# EAGLE board SparkFun_Thing_Plus_NORA_W306-Panel (EAGLE 9.6.2), part 1 of 7
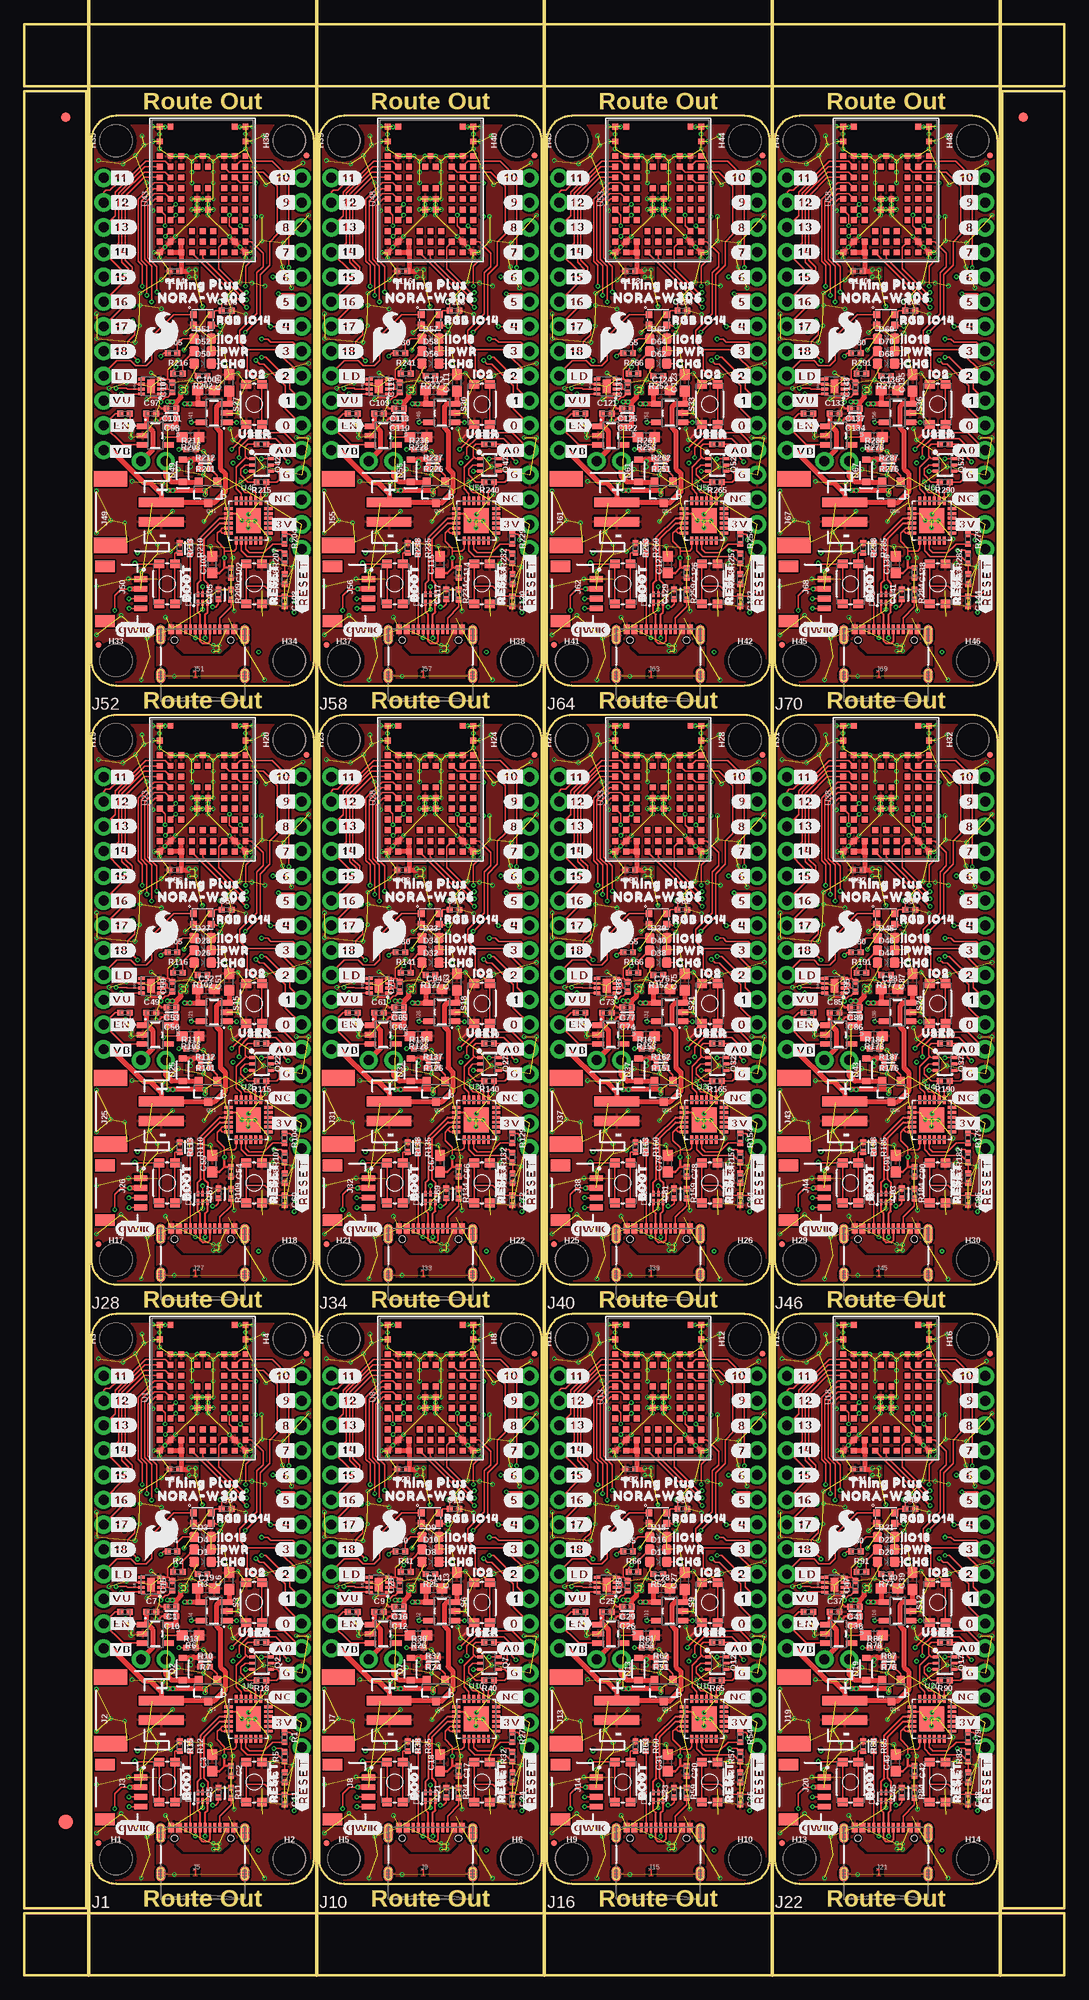
[diagram p0: board, top side]
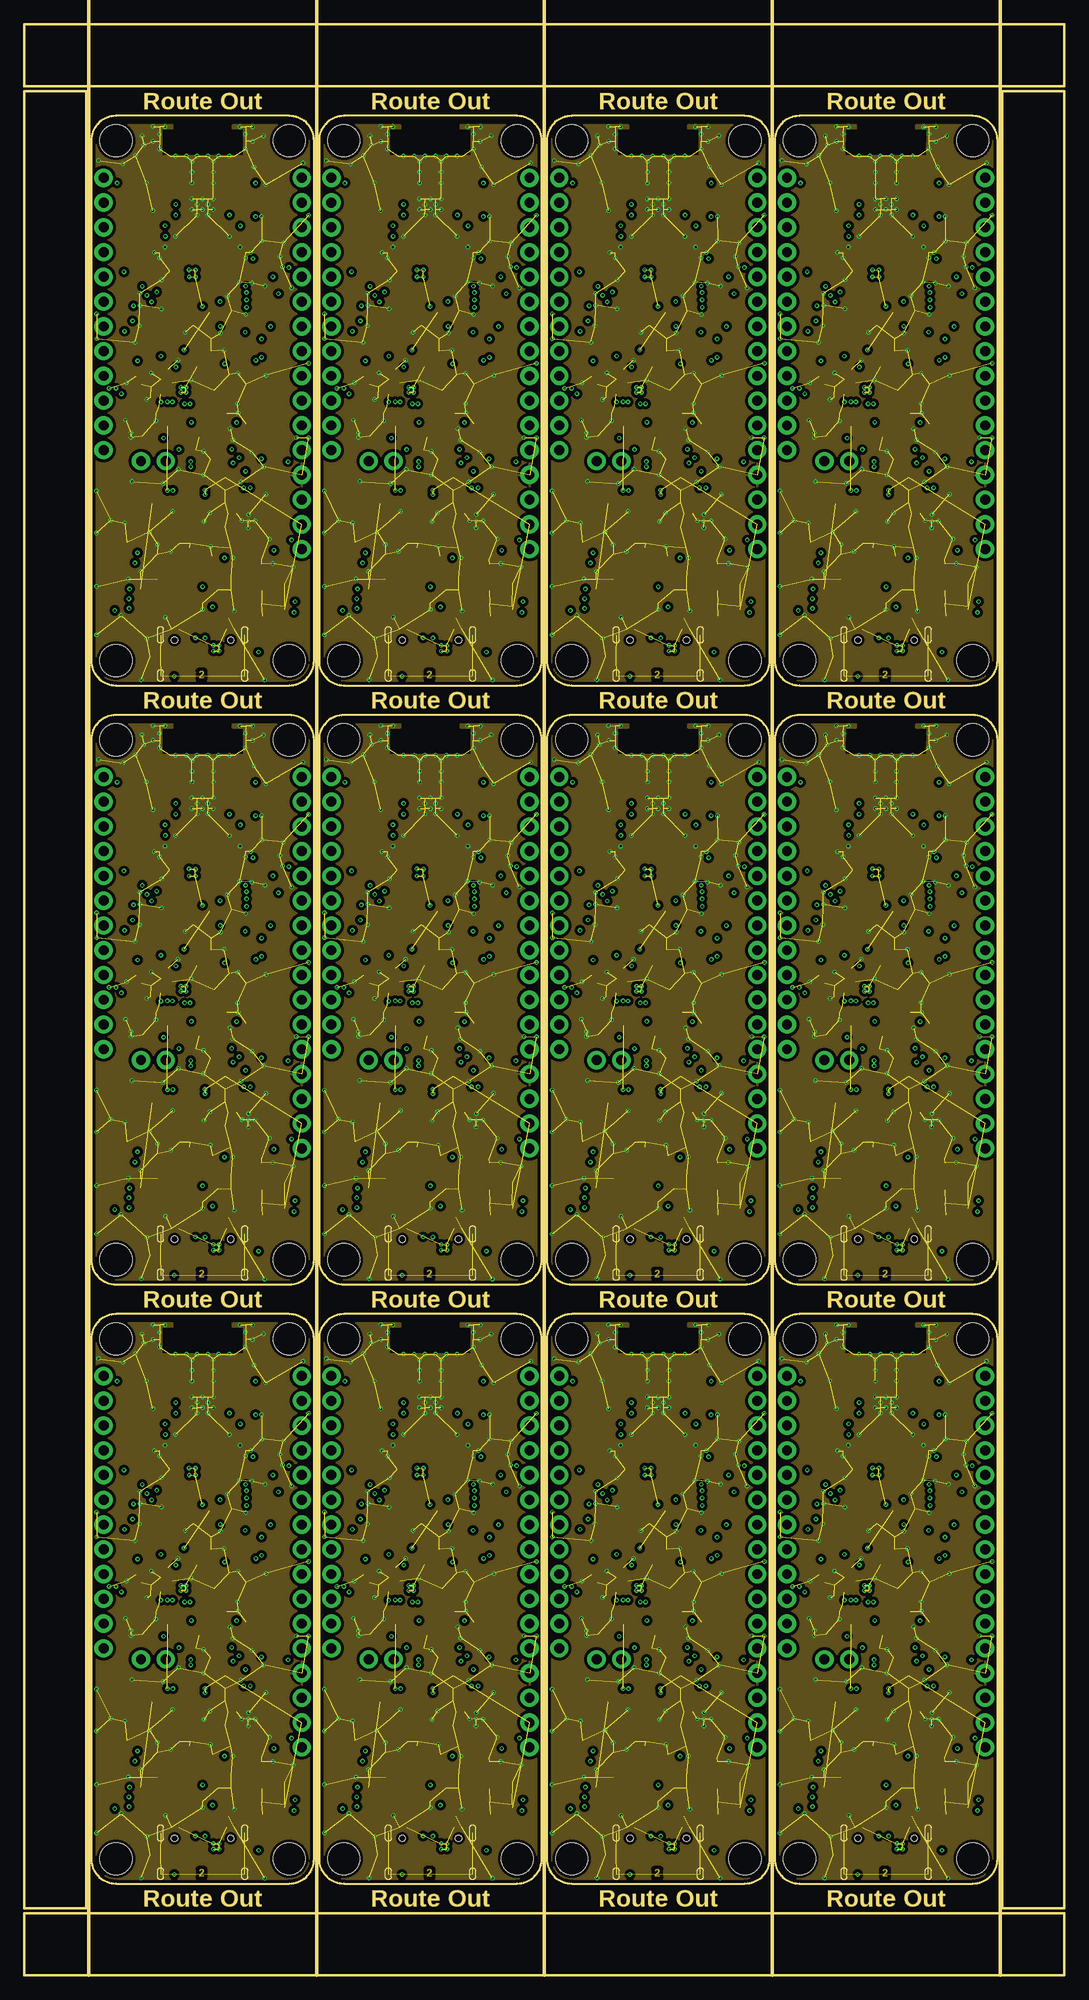
[diagram p1: board, inner layer Route2]
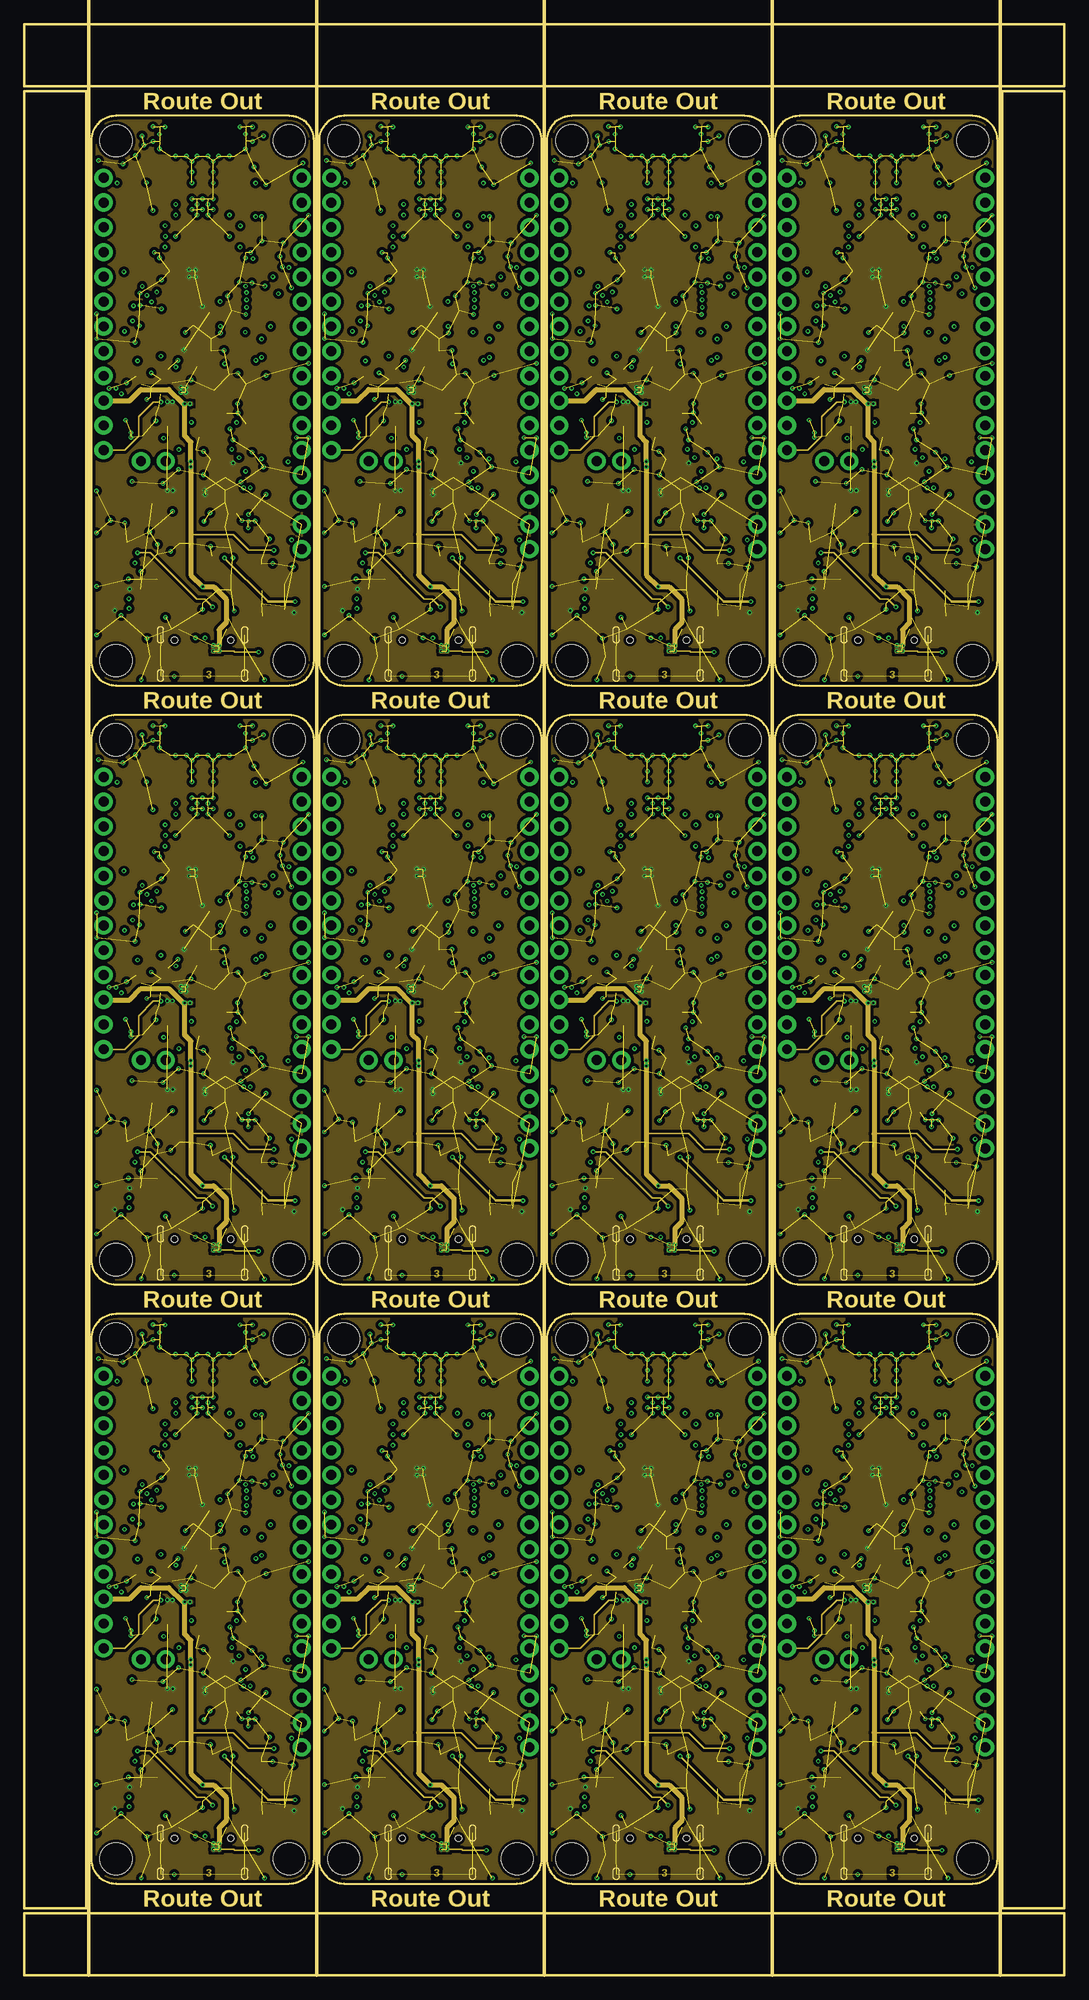
[diagram p2: board, inner layer Route15]
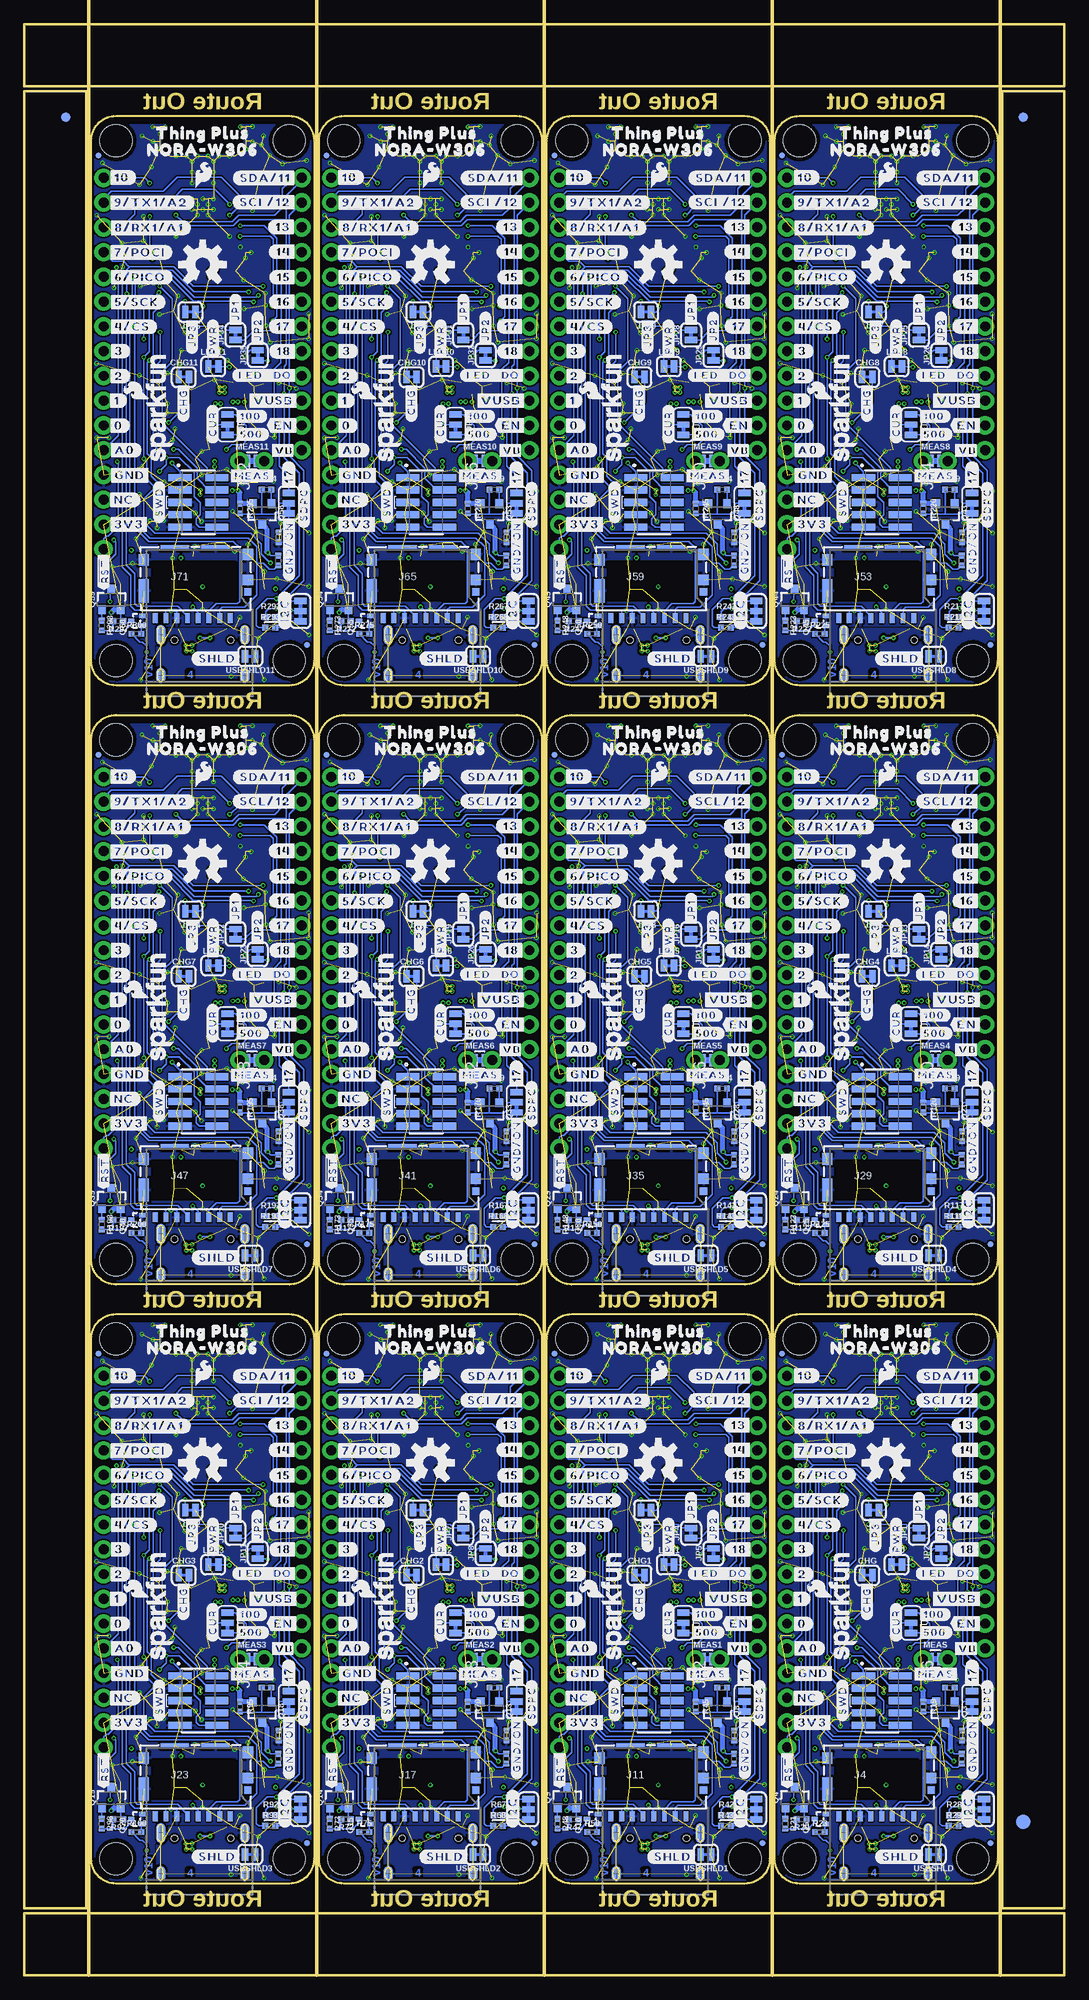
[diagram p3: board, bottom side, seen from below]

Size 106.68 x 200.15 mm. Coordinates in mm from the lower left corner, seen from the top.
Outline: 29.72,11.94 29.72,65.28 arc90 27.18,67.82 9.4,67.82 arc90 6.86,65.28 6.86,11.94 arc90 9.4,9.4 27.18,9.4 arc90 29.72,11.94
Outline: 53.09,11.94 53.09,65.28 arc90 50.55,67.82 32.77,67.82 arc90 30.23,65.28 30.23,11.94 arc90 32.77,9.4 50.55,9.4 arc90 53.09,11.94
Outline: 76.45,11.94 76.45,65.28 arc90 73.91,67.82 56.13,67.82 arc90 53.59,65.28 53.59,11.94 arc90 56.13,9.4 73.91,9.4 arc90 76.45,11.94
Outline: 99.82,11.94 99.82,65.28 arc90 97.28,67.82 79.5,67.82 arc90 76.96,65.28 76.96,11.94 arc90 79.5,9.4 97.28,9.4 arc90 99.82,11.94
Outline: 29.72,73.41 29.72,126.75 arc90 27.18,129.29 9.4,129.29 arc90 6.86,126.75 6.86,73.41 arc90 9.4,70.87 27.18,70.87 arc90 29.72,73.41
Outline: 53.09,73.41 53.09,126.75 arc90 50.55,129.29 32.77,129.29 arc90 30.23,126.75 30.23,73.41 arc90 32.77,70.87 50.55,70.87 arc90 53.09,73.41
Outline: 76.45,73.41 76.45,126.75 arc90 73.91,129.29 56.13,129.29 arc90 53.59,126.75 53.59,73.41 arc90 56.13,70.87 73.91,70.87 arc90 76.45,73.41
Outline: 99.82,73.41 99.82,126.75 arc90 97.28,129.29 79.5,129.29 arc90 76.96,126.75 76.96,73.41 arc90 79.5,70.87 97.28,70.87 arc90 99.82,73.41
Outline: 29.72,134.87 29.72,188.21 arc90 27.18,190.75 9.4,190.75 arc90 6.86,188.21 6.86,134.87 arc90 9.4,132.33 27.18,132.33 arc90 29.72,134.87
Outline: 53.09,134.87 53.09,188.21 arc90 50.55,190.75 32.77,190.75 arc90 30.23,188.21 30.23,134.87 arc90 32.77,132.33 50.55,132.33 arc90 53.09,134.87
Outline: 76.45,134.87 76.45,188.21 arc90 73.91,190.75 56.13,190.75 arc90 53.59,188.21 53.59,134.87 arc90 56.13,132.33 73.91,132.33 arc90 76.45,134.87
Outline: 99.82,134.87 99.82,188.21 arc90 97.28,190.75 79.5,190.75 arc90 76.96,188.21 76.96,134.87 arc90 79.5,132.33 97.28,132.33 arc90 99.82,134.87
Outline: 0,6.35 106.68,6.35 106.68,0 0,0 0,6.35
Outline: 100.33,193.29 106.68,193.29 106.68,6.86 100.33,6.86 100.33,193.29
Outline: 0,200.15 106.68,200.15 106.68,193.8 0,193.8 0,200.15
Outline: 0,193.29 6.35,193.29 6.35,6.86 0,6.86 0,193.29
Copper layers (1*2*15*16): Top 0.035559375mm / dielectric 0.47751875mm / Route2 0.035559375mm / dielectric 0.47751875mm / Route15 0.035559375mm / dielectric 0.47751875mm / Bottom 0.035559375mm
Design rules "SparkFun_Thing_Plus_NORA_W306": minimum track width 5mil, minimum drill 0.2mm, track to track 5mil, track to pad 5mil, pad to pad 5mil, via to via 5mil, smd to smd 5mil, copper to edge 7mil, drill to drill 7mil, minimum pad ring 5mil, minimum via ring 5mil, stop-mask expansion 2.5mil, vias tented up to drill 25mil, thermal gap 10mil
Net classes: 0 default: width 0 mm, drill 0 mm
tRestrict: area 24.4,26.2 to 24.5,26.4; area 22.9,27.7 to 23,27.8; area 21.5,26.2 to 21.6,26.4; area 22.9,24.8 to 23.1,24.9; area 47.8,26.2 to 47.9,26.4; area 46.3,27.7 to 46.4,27.8; area 44.9,26.2 to 44.9,26.4; area 46.3,24.8 to 46.4,24.9; area 71.1,26.2 to 71.2,26.4; area 69.7,27.7 to 69.8,27.8; area 68.2,26.2 to 68.3,26.4; area 69.7,24.8 to 69.8,24.9; area 94.5,26.2 to 94.6,26.4; area 93,27.7 to 93.2,27.8; area 91.6,26.2 to 91.7,26.4; area 93,24.8 to 93.2,24.9; area 24.4,87.7 to 24.5,87.8; area 22.9,89.2 to 23,89.3; area 21.5,87.7 to 21.6,87.8; area 22.9,86.3 to 23.1,86.4; area 47.8,87.7 to 47.9,87.8; area 46.3,89.2 to 46.4,89.3; area 44.9,87.7 to 44.9,87.8; area 46.3,86.3 to 46.4,86.4; area 71.1,87.7 to 71.2,87.8; area 69.7,89.2 to 69.8,89.3; area 68.2,87.7 to 68.3,87.8; area 69.7,86.3 to 69.8,86.4; area 94.5,87.7 to 94.6,87.8; area 93,89.2 to 93.2,89.3; area 91.6,87.7 to 91.7,87.8; area 93,86.3 to 93.2,86.4; area 24.4,149.2 to 24.5,149.3; area 22.9,150.6 to 23,150.7; area 21.5,149.2 to 21.6,149.3; area 22.9,147.8 to 23.1,147.8; area 47.8,149.2 to 47.9,149.3; area 46.3,150.6 to 46.4,150.7; area 44.9,149.2 to 44.9,149.3; area 46.3,147.8 to 46.4,147.8; area 71.1,149.2 to 71.2,149.3; area 69.7,150.6 to 69.8,150.7; area 68.2,149.2 to 68.3,149.3; area 69.7,147.8 to 69.8,147.8; area 94.5,149.2 to 94.6,149.3; area 93,150.6 to 93.2,150.7; area 91.6,149.2 to 91.7,149.3; area 93,147.8 to 93.2,147.8
Milling: 5 lines

## Footprints (pad centres in the part's own frame; a part is rotated, then mirrored left to right if it is on the bottom)
0402-TIGHT = smd 0.6 x 0.6: 1 -0.5,0; 2 0.5,0
0603 = smd 1.1 x 1: 1 -0.85,0; 2 0.85,0
SMT-JUMPER_2_NC_TRACE_SILK = smd 0.66 x 1.27: 1 -0.521,0; 2 0.521,0
SMT-JUMPER_3_1-NC_TRACE_SILK = smd 0.66 x 1.27: 1 -1.041,0; 2 0,0; 3 1.041,0
LED-0603 = smd 1 x 1: A -0.877,0; C 0.877,0
SOD-323 = smd 0.63 x 0.83: A 1.15,0; C -1.15,0
WS2812-2020 = smd 0.7 x 0.7: DI -0.915,0.55; DO 0.915,-0.55; GND 0.915,0.55; VCC -0.915,-0.55
SOT886 = smd 0.61 x 0.25: 1 -0.405,0.5 | smd 0.56 x 0.25: 2 -0.43,0; 3 -0.43,-0.5; 4 0.43,-0.5; 5 0.43,0; 6 0.43,0.5
FIDUCIAL-1X2 = smd 1 x 1: 1 0,0
FIDUCIAL-1.5X3 = smd 1.5 x 1.5: 1 0,0
FIDUCIAL-MICRO = smd 0.635 x 0.635: 1 0,0
STAND-OFF = hole 3.302: 0,0
SMT-JUMPER_3_2-NC_TRACE_SILK = smd 0.66 x 1.27: 1 -1.041,0; 2 0,0; 3 1.041,0
THING_PLUS = drill 1.016 pad 1.88: 1 1.27,52.07; 2 1.27,49.53; 3 1.27,46.99; 4 1.27,44.45; 5 1.27,41.91; 6 1.27,39.37; 7 1.27,36.83; 8 1.27,34.29; 9 1.27,31.75; 10 1.27,29.21; 11 1.27,26.67; 12 1.27,24.13; 13 21.59,52.07; 14 21.59,49.53; 15 21.59,46.99; 16 21.59,44.45; 17 21.59,41.91; 18 21.59,39.37; 19 21.59,36.83; 20 21.59,34.29; 21 21.59,31.75; 22 21.59,29.21; 23 21.59,26.67; 24 21.59,24.13; 25 21.59,21.59; 26 21.59,19.05; 27 21.59,16.51; 28 21.59,13.97
JST-2-SMD = smd 1 x 4.6: 1 -1,-3.7; 2 1,-3.7 | smd 1.6 x 3.4: NC1 -3.4,1.5; NC2 3.4,1.5
JST04_1MM_RA = smd 0.6 x 1.35: 1 -1.5,0; 2 -0.5,0; 3 0.5,0; 4 1.5,0 | smd 1.2 x 2: NC1 2.8,-3.675; NC2 -2.8,-3.675
MICROSD_TINY = smd 0.5 x 1: 1 3.55,-3.85; 2 2.45,-3.85; 3 1.35,-3.85; 4 0.25,-3.85; 5 -0.85,-3.85; 6 -1.95,-3.85; 7 -3.05,-3.85; 8 -4.15,-3.85 | smd 0.72 x 0.78: 9 5.35,-1.17 | smd 1.05 x 1.08: GND1 5.35,0.1 | smd 1.05 x 1.2: GND2 5.35,2.71; GND3 -5.325,2.14 | smd 1.05 x 2.39: GND4 -5.325,-1.045 | smd 2.91 x 0.55: GND5 -2.145,3.385; GND6 2.045,3.385
USB-C-16P-4LAYER-ISOLATED = smd 0.3 x 1: A5 -1.25,-0.34; A6 -0.25,-0.34; A7 0.25,-0.34; A8 1.25,-0.34; B5 1.75,-0.34; B6 0.75,-0.34; B7 -0.75,-0.34; B8 -1.75,-0.34 | smd 0.6 x 1: GND -3.225,-0.34; GND2 3.225,-0.34; VBUS1 -2.45,-0.34; VBUS2 2.45,-0.34 | smd 1 x 2.1: SHLD1 -4.32,-0.915; SHLD2 4.32,-0.915 | smd 1 x 2.1 bottom: SHLD3 -4.32,-0.915; SHLD4 4.32,-0.915 | smd 1 x 1.6: SHLD5 -4.32,-5.095; SHLD8 4.32,-5.095 | smd 1 x 1.6 bottom: SHLD6 -4.32,-5.095; SHLD7 4.32,-5.095 | hole 0.65: -2.89,-1.445; 2.89,-1.445
2X5-SMD-UNSHROUDED_DNP_NO_PASTE = smd 0.74 x 2.38: 1 -2.54,-1.88; 2 -2.54,1.88; 3 -1.27,-1.88; 4 -1.27,1.88; 5 0,-1.88; 6 0,1.88; 7 1.27,-1.88; 8 1.27,1.88; 9 2.54,-1.88; 10 2.54,1.88
COMBO-JUMPER_2_NC_TRACE = smd 0.635 x 1.27: 1 -0.508,0; 2 0.508,0 | drill 1.016 pad 1.88: 3 -1.27,0; 4 1.27,0
SOT23-3 = smd 0.8 x 0.9: 1 -0.95,-1; 2 0.95,-1; 3 0,1.1
SC70-6 = smd 0.3 x 0.66: 1 -0.65,-0.92; 2 0,-0.92; 3 0.65,-0.92; 4 0.65,0.92; 5 0,0.92; 6 -0.65,0.92
SOT-416FL = smd 0.46 x 0.65: 1 -0.5,-1.1; 2 0.5,-1.1; 3 0,0.05
TACTILE_SWITCH_SMD_4.6X2.8MM = smd 0.9 x 1: 1 -2.05,-0.8; 2 2.05,-0.8; 3 2.05,0.8; 4 -2.05,0.8
UBLOX-NORA-W3 = smd 0.6 x 0.6: A1 -5.5,-4.4; A2 -5.5,-3.3; A3 -5.5,-2.2; A4 -5.5,-1.1; A5 -5.5,0; A6 -5.5,1.1; A7 -5.5,2.2; A8 -5.5,3.3; A9 -5.5,4.4; B1 -4.4,-4.4; B2 -4.4,-3.3; B3 -4.4,-2.2; B4 -4.4,-1.1; B5 -4.4,0; B6 -4.4,1.1; B7 -4.4,2.2; B8 -4.4,3.3; B9 -4.4,4.4; C1 -3.3,-4.4; C2 -3.3,-3.3; C4 -3.3,-1.1; C5 -3.3,0; C6 -3.3,1.1; C8 -3.3,3.3; C9 -3.3,4.4; D1 -2.2,-4.4; D2 -2.2,-3.3; D3 -2.2,-2.2; D7 -2.2,2.2; D8 -2.2,3.3; D9 -2.2,4.4; E1 -1.1,-4.4; E2 -1.1,-3.3; E3 -1.1,-2.2; E4 -1.1,-0.55; E5 -1.1,0.55; E7 -1.1,2.2; E8 -1.1,3.3; E9 -1.1,4.4; F1 0,-4.4; F2 0,-3.3; F3 0,-2.2; F4 0,-0.55; F5 0,0.55; F7 0,2.2; F8 0,3.3; F9 0,4.4; G1 1.1,-4.4; G2 1.1,-3.3; G3 1.1,-2.2; G4 1.1,-0.55; G5 1.1,0.55; G7 1.1,2.2; G8 1.1,3.3; G9 1.1,4.4; H1 2.2,-4.4; H2 2.2,-3.3; H3 2.2,-2.2; H7 2.2,2.2; H8 2.2,3.3; H9 2.2,4.4; J1 3.3,-4.4; J2 3.3,-3.3; J3 3.3,-2.2; J4 3.3,-0.55; J5 3.3,0.55; J7 3.3,2.2; J8 3.3,3.3; J9 3.3,4.4; K1 4.4,-4.4; K2 4.4,-3.3; K3 4.4,-2.2; K5 4.4,0; K7 4.4,2.2; K8 4.4,3.3; K9 4.4,4.4; L1 5.9,-4.4; L9 5.9,4.4; M1 7.4,-4.4; M2 7.4,-3.3; M8 7.4,3.3; M9 7.4,4.4
SOT23-5 = smd 0.55 x 1.2: 1 -0.95,-1.3; 2 0,-1.3; 3 0.95,-1.3; 4 0.95,1.3; 5 -0.95,1.3
DFN-8 = smd 0.3 x 0.7: 1 -0.75,-0.99; 2 -0.25,-0.99; 3 0.25,-0.99; 4 0.75,-0.99; 5 0.75,0.99; 6 0.25,0.99; 7 -0.25,0.99; 8 -0.75,0.99 | smd 1.38 x 0.8: 9 0,0
QFN24 = smd 0.85 x 0.3: 1 -2.05,1.25; 2 -2.05,0.75; 3 -2.05,0.25; 4 -2.05,-0.25; 5 -2.05,-0.75; 6 -2.05,-1.25; 13 2.05,-1.25; 14 2.05,-0.75; 15 2.05,-0.25; 16 2.05,0.25; 17 2.05,0.75; 18 2.05,1.25 | smd 0.3 x 0.85: 7 -1.25,-2.05; 8 -0.75,-2.05; 9 -0.25,-2.05; 10 0.25,-2.05; 11 0.75,-2.05; 12 1.25,-2.05; 19 1.25,2.05; 20 0.75,2.05; 21 0.25,2.05; 22 -0.25,2.05; 23 -0.75,2.05; 24 -1.25,2.05 | smd 2.55 x 2.55: PAD 0,0

## Placement (x,y rotation side)
C1  10uF  [0402-TIGHT]  15.08,37.8 180 top
C2  0.1uF  [0402-TIGHT]  21.2,20.96 270 top
C3  4.7uF  [0603]  19.27,21.79 90 top
C4  10uF  [0402-TIGHT]  15.39,51.91 180 top
C5  10uF  [0402-TIGHT]  19.91,18.74 90 top
C6  4.7uF  [0603]  21.01,40.44 90 top
C7  1.0uF  [0402-TIGHT]  13.01,37.27 0 top
C8  0.1uF  [0402-TIGHT]  20.76,47.84 0 top
C9  1.0uF  [0402-TIGHT]  36.38,37.27 0 top
C10  1.0uF  [0402-TIGHT]  15.09,36.83 180 top
C11  0.1uF  [0402-TIGHT]  26.69,18.03 270 top
C12  1.0uF  [0402-TIGHT]  38.45,36.83 180 top
C13  4.7uF  [0603]  44.38,40.44 90 top
C14  4.7uF  [0603]  42,39.67 0 top
C15  0.1uF  [0402-TIGHT]  15.15,39.96 90 top
C16  10uF  [0402-TIGHT]  38.45,37.8 180 top
C17  0.1uF  [0402-TIGHT]  44.56,20.96 270 top
C18  4.7uF  [0603]  42.64,21.79 90 top
C19  4.7uF  [0603]  18.63,39.67 0 top
C20  10uF  [0402-TIGHT]  38.76,51.91 180 top
C21  10uF  [0402-TIGHT]  43.27,18.74 90 top
C22  0.1uF  [0402-TIGHT]  44.13,47.84 0 top
C23  0.1uF  [0402-TIGHT]  38.52,39.96 90 top
C24  0.1uF  [0402-TIGHT]  50.06,18.03 270 top
C25  1.0uF  [0402-TIGHT]  59.75,37.27 0 top
C26  1.0uF  [0402-TIGHT]  61.82,36.83 180 top
C27  4.7uF  [0603]  67.74,40.44 90 top
C28  4.7uF  [0603]  65.37,39.67 0 top
C29  10uF  [0402-TIGHT]  61.82,37.8 180 top
C30  0.1uF  [0402-TIGHT]  67.93,20.96 270 top
C31  4.7uF  [0603]  66.01,21.79 90 top
C32  10uF  [0402-TIGHT]  62.13,51.91 180 top
C33  10uF  [0402-TIGHT]  66.64,18.74 90 top
C34  0.1uF  [0402-TIGHT]  67.5,47.84 0 top
C35  0.1uF  [0402-TIGHT]  61.89,39.96 90 top
C36  0.1uF  [0402-TIGHT]  73.43,18.03 270 top
C37  1.0uF  [0402-TIGHT]  83.11,37.27 0 top
C38  1.0uF  [0402-TIGHT]  85.19,36.83 180 top
C39  4.7uF  [0603]  91.11,40.44 90 top
C40  4.7uF  [0603]  88.74,39.67 0 top
C41  10uF  [0402-TIGHT]  85.18,37.8 180 top
C42  0.1uF  [0402-TIGHT]  91.3,20.96 270 top
C43  4.7uF  [0603]  89.37,21.79 90 top
C44  10uF  [0402-TIGHT]  85.5,51.91 180 top
C45  10uF  [0402-TIGHT]  90.01,18.74 90 top
C46  0.1uF  [0402-TIGHT]  90.87,47.84 0 top
C47  0.1uF  [0402-TIGHT]  85.26,39.96 90 top
C48  0.1uF  [0402-TIGHT]  96.8,18.03 270 top
C49  1.0uF  [0402-TIGHT]  13.01,98.73 0 top
C50  1.0uF  [0402-TIGHT]  15.09,98.3 180 top
C51  4.7uF  [0603]  21.01,101.9 90 top
C52  4.7uF  [0603]  18.63,101.14 0 top
C53  10uF  [0402-TIGHT]  15.08,99.26 180 top
C54  0.1uF  [0402-TIGHT]  21.2,82.43 270 top
C55  4.7uF  [0603]  19.27,83.26 90 top
C56  10uF  [0402-TIGHT]  15.39,113.38 180 top
C57  10uF  [0402-TIGHT]  19.91,80.21 90 top
C58  0.1uF  [0402-TIGHT]  20.76,109.31 0 top
C59  0.1uF  [0402-TIGHT]  15.15,101.43 90 top
C60  0.1uF  [0402-TIGHT]  26.69,79.5 270 top
C61  1.0uF  [0402-TIGHT]  36.38,98.73 0 top
C62  1.0uF  [0402-TIGHT]  38.45,98.3 180 top
C63  4.7uF  [0603]  44.38,101.9 90 top
C64  4.7uF  [0603]  42,101.14 0 top
C65  10uF  [0402-TIGHT]  38.45,99.26 180 top
C66  0.1uF  [0402-TIGHT]  44.56,82.43 270 top
C67  4.7uF  [0603]  42.64,83.26 90 top
C68  10uF  [0402-TIGHT]  38.76,113.38 180 top
C69  10uF  [0402-TIGHT]  43.27,80.21 90 top
C70  0.1uF  [0402-TIGHT]  44.13,109.31 0 top
C71  0.1uF  [0402-TIGHT]  38.52,101.43 90 top
C72  0.1uF  [0402-TIGHT]  50.06,79.5 270 top
C73  1.0uF  [0402-TIGHT]  59.75,98.73 0 top
C74  1.0uF  [0402-TIGHT]  61.82,98.3 180 top
C75  4.7uF  [0603]  67.74,101.9 90 top
C76  4.7uF  [0603]  65.37,101.14 0 top
C77  10uF  [0402-TIGHT]  61.82,99.26 180 top
C78  0.1uF  [0402-TIGHT]  67.93,82.43 270 top
C79  4.7uF  [0603]  66.01,83.26 90 top
C80  10uF  [0402-TIGHT]  62.13,113.38 180 top
C81  10uF  [0402-TIGHT]  66.64,80.21 90 top
C82  0.1uF  [0402-TIGHT]  67.5,109.31 0 top
C83  0.1uF  [0402-TIGHT]  61.89,101.43 90 top
C84  0.1uF  [0402-TIGHT]  73.43,79.5 270 top
C85  1.0uF  [0402-TIGHT]  83.11,98.73 0 top
C86  1.0uF  [0402-TIGHT]  85.19,98.3 180 top
C87  4.7uF  [0603]  91.11,101.9 90 top
C88  4.7uF  [0603]  88.74,101.14 0 top
C89  10uF  [0402-TIGHT]  85.18,99.26 180 top
C90  0.1uF  [0402-TIGHT]  91.3,82.43 270 top
C91  4.7uF  [0603]  89.37,83.26 90 top
C92  10uF  [0402-TIGHT]  85.5,113.38 180 top
C93  10uF  [0402-TIGHT]  90.01,80.21 90 top
C94  0.1uF  [0402-TIGHT]  90.87,109.31 0 top
C95  0.1uF  [0402-TIGHT]  85.26,101.43 90 top
C96  0.1uF  [0402-TIGHT]  96.8,79.5 270 top
C97  1.0uF  [0402-TIGHT]  13.01,160.2 0 top
C98  1.0uF  [0402-TIGHT]  15.09,159.77 180 top
C99  4.7uF  [0603]  21.01,163.37 90 top
C100  4.7uF  [0603]  18.63,162.61 0 top
C101  10uF  [0402-TIGHT]  15.08,160.73 180 top
C102  0.1uF  [0402-TIGHT]  21.2,143.9 270 top
C103  4.7uF  [0603]  19.27,144.72 90 top
C104  10uF  [0402-TIGHT]  15.39,174.85 180 top
C105  10uF  [0402-TIGHT]  19.91,141.68 90 top
C106  0.1uF  [0402-TIGHT]  20.76,170.78 0 top
C107  0.1uF  [0402-TIGHT]  15.15,162.9 90 top
C108  0.1uF  [0402-TIGHT]  26.69,140.97 270 top
C109  1.0uF  [0402-TIGHT]  36.38,160.2 0 top
C110  1.0uF  [0402-TIGHT]  38.45,159.77 180 top
C111  4.7uF  [0603]  44.38,163.37 90 top
C112  4.7uF  [0603]  42,162.61 0 top
C113  10uF  [0402-TIGHT]  38.45,160.73 180 top
C114  0.1uF  [0402-TIGHT]  44.56,143.9 270 top
C115  4.7uF  [0603]  42.64,144.72 90 top
C116  10uF  [0402-TIGHT]  38.76,174.85 180 top
C117  10uF  [0402-TIGHT]  43.27,141.68 90 top
C118  0.1uF  [0402-TIGHT]  44.13,170.78 0 top
C119  0.1uF  [0402-TIGHT]  38.52,162.9 90 top
C120  0.1uF  [0402-TIGHT]  50.06,140.97 270 top
C121  1.0uF  [0402-TIGHT]  59.75,160.2 0 top
C122  1.0uF  [0402-TIGHT]  61.82,159.77 180 top
C123  4.7uF  [0603]  67.74,163.37 90 top
C124  4.7uF  [0603]  65.37,162.61 0 top
C125  10uF  [0402-TIGHT]  61.82,160.73 180 top
C126  0.1uF  [0402-TIGHT]  67.93,143.9 270 top
C127  4.7uF  [0603]  66.01,144.72 90 top
C128  10uF  [0402-TIGHT]  62.13,174.85 180 top
C129  10uF  [0402-TIGHT]  66.64,141.68 90 top
C130  0.1uF  [0402-TIGHT]  67.5,170.78 0 top
C131  0.1uF  [0402-TIGHT]  61.89,162.9 90 top
C132  0.1uF  [0402-TIGHT]  73.43,140.97 270 top
C133  1.0uF  [0402-TIGHT]  83.11,160.2 0 top
C134  1.0uF  [0402-TIGHT]  85.19,159.77 180 top
C135  4.7uF  [0603]  91.11,163.37 90 top
C136  4.7uF  [0603]  88.74,162.61 0 top
C137  10uF  [0402-TIGHT]  85.18,160.73 180 top
C138  0.1uF  [0402-TIGHT]  91.3,143.9 270 top
C139  4.7uF  [0603]  89.37,144.72 90 top
C140  10uF  [0402-TIGHT]  85.5,174.85 180 top
C141  10uF  [0402-TIGHT]  90.01,141.68 90 top
C142  0.1uF  [0402-TIGHT]  90.87,170.78 0 top
C143  0.1uF  [0402-TIGHT]  85.26,162.9 90 top
C144  0.1uF  [0402-TIGHT]  96.8,140.97 270 top
CHG  [SMT-JUMPER_2_NC_TRACE_SILK]  20.22,41.03 0 bottom
CHG1  [SMT-JUMPER_2_NC_TRACE_SILK]  43.59,41.03 0 bottom
CHG2  [SMT-JUMPER_2_NC_TRACE_SILK]  66.96,41.03 0 bottom
CHG3  [SMT-JUMPER_2_NC_TRACE_SILK]  90.32,41.03 0 bottom
CHG4  [SMT-JUMPER_2_NC_TRACE_SILK]  20.22,102.49 0 bottom
CHG5  [SMT-JUMPER_2_NC_TRACE_SILK]  43.59,102.49 0 bottom
CHG6  [SMT-JUMPER_2_NC_TRACE_SILK]  66.96,102.49 0 bottom
CHG7  [SMT-JUMPER_2_NC_TRACE_SILK]  90.32,102.49 0 bottom
CHG8  [SMT-JUMPER_2_NC_TRACE_SILK]  20.22,163.96 0 bottom
CHG9  [SMT-JUMPER_2_NC_TRACE_SILK]  43.59,163.96 0 bottom
CHG10  [SMT-JUMPER_2_NC_TRACE_SILK]  66.96,163.96 0 bottom
CHG11  [SMT-JUMPER_2_NC_TRACE_SILK]  90.32,163.96 0 bottom
CUR  [SMT-JUMPER_3_1-NC_TRACE_SILK]  15.72,36.14 270 bottom
CUR1  [SMT-JUMPER_3_1-NC_TRACE_SILK]  39.09,36.14 270 bottom
CUR2  [SMT-JUMPER_3_1-NC_TRACE_SILK]  62.46,36.14 270 bottom
CUR3  [SMT-JUMPER_3_1-NC_TRACE_SILK]  85.83,36.14 270 bottom
CUR4  [SMT-JUMPER_3_1-NC_TRACE_SILK]  15.72,97.61 270 bottom
CUR5  [SMT-JUMPER_3_1-NC_TRACE_SILK]  39.09,97.61 270 bottom
CUR6  [SMT-JUMPER_3_1-NC_TRACE_SILK]  62.46,97.61 270 bottom
CUR7  [SMT-JUMPER_3_1-NC_TRACE_SILK]  85.83,97.61 270 bottom
CUR8  [SMT-JUMPER_3_1-NC_TRACE_SILK]  15.72,159.08 270 bottom
CUR9  [SMT-JUMPER_3_1-NC_TRACE_SILK]  39.09,159.08 270 bottom
CUR10  [SMT-JUMPER_3_1-NC_TRACE_SILK]  62.46,159.08 270 bottom
CUR11  [SMT-JUMPER_3_1-NC_TRACE_SILK]  85.83,159.08 270 bottom
D1  Yellow  [LED-0603]  18.29,42.42 0 top
D2  1A/23V/620mV  [SOD-323]  16.26,31.42 90 top
D3  BLUE  [LED-0603]  18.29,44.96 0 top
D4  RED  [LED-0603]  18.29,43.69 0 top
D5  WS2812  [WS2812-2020]  18.26,46.89 180 top
D6  PRTR5V0U2F  [SOT886]  18.29,18.29 90 top
D7  1A/23V/620mV  [SOD-323]  39.62,31.42 90 top
D8  Yellow  [LED-0603]  41.66,42.42 0 top
D9  BLUE  [LED-0603]  41.66,44.96 0 top
D10  RED  [LED-0603]  41.66,43.69 0 top
D11  PRTR5V0U2F  [SOT886]  41.66,18.29 90 top
D12  WS2812  [WS2812-2020]  41.63,46.89 180 top
D13  1A/23V/620mV  [SOD-323]  62.99,31.42 90 top
D14  Yellow  [LED-0603]  65.02,42.42 0 top
D15  BLUE  [LED-0603]  65.02,44.96 0 top
D16  RED  [LED-0603]  65.02,43.69 0 top
D17  PRTR5V0U2F  [SOT886]  65.02,18.29 90 top
D18  WS2812  [WS2812-2020]  64.99,46.89 180 top
D19  1A/23V/620mV  [SOD-323]  86.36,31.42 90 top
D20  Yellow  [LED-0603]  88.39,42.42 0 top
D21  BLUE  [LED-0603]  88.39,44.96 0 top
D22  RED  [LED-0603]  88.39,43.69 0 top
D23  PRTR5V0U2F  [SOT886]  88.39,18.29 90 top
D24  WS2812  [WS2812-2020]  88.36,46.89 180 top
D25  1A/23V/620mV  [SOD-323]  16.26,92.89 90 top
D26  Yellow  [LED-0603]  18.29,103.89 0 top
D27  BLUE  [LED-0603]  18.29,106.43 0 top
D28  RED  [LED-0603]  18.29,105.16 0 top
D29  PRTR5V0U2F  [SOT886]  18.29,79.76 90 top
D30  WS2812  [WS2812-2020]  18.26,108.36 180 top
D31  1A/23V/620mV  [SOD-323]  39.62,92.89 90 top
D32  Yellow  [LED-0603]  41.66,103.89 0 top
D33  BLUE  [LED-0603]  41.66,106.43 0 top
D34  RED  [LED-0603]  41.66,105.16 0 top
D35  PRTR5V0U2F  [SOT886]  41.66,79.76 90 top
D36  WS2812  [WS2812-2020]  41.63,108.36 180 top
D37  1A/23V/620mV  [SOD-323]  62.99,92.89 90 top
D38  Yellow  [LED-0603]  65.02,103.89 0 top
D39  BLUE  [LED-0603]  65.02,106.43 0 top
D40  RED  [LED-0603]  65.02,105.16 0 top
D41  PRTR5V0U2F  [SOT886]  65.02,79.76 90 top
D42  WS2812  [WS2812-2020]  64.99,108.36 180 top
D43  1A/23V/620mV  [SOD-323]  86.36,92.89 90 top
D44  Yellow  [LED-0603]  88.39,103.89 0 top
D45  BLUE  [LED-0603]  88.39,106.43 0 top
D46  RED  [LED-0603]  88.39,105.16 0 top
D47  PRTR5V0U2F  [SOT886]  88.39,79.76 90 top
D48  WS2812  [WS2812-2020]  88.36,108.36 180 top
D49  1A/23V/620mV  [SOD-323]  16.26,154.36 90 top
D50  Yellow  [LED-0603]  18.29,165.35 0 top
D51  BLUE  [LED-0603]  18.29,167.89 0 top
D52  RED  [LED-0603]  18.29,166.62 0 top
D53  PRTR5V0U2F  [SOT886]  18.29,141.22 90 top
D54  WS2812  [WS2812-2020]  18.26,169.83 180 top
D55  1A/23V/620mV  [SOD-323]  39.62,154.36 90 top
D56  Yellow  [LED-0603]  41.66,165.35 0 top
D57  BLUE  [LED-0603]  41.66,167.89 0 top
D58  RED  [LED-0603]  41.66,166.62 0 top
D59  PRTR5V0U2F  [SOT886]  41.66,141.22 90 top
D60  WS2812  [WS2812-2020]  41.63,169.83 180 top
D61  1A/23V/620mV  [SOD-323]  62.99,154.36 90 top
D62  Yellow  [LED-0603]  65.02,165.35 0 top
D63  BLUE  [LED-0603]  65.02,167.89 0 top
D64  RED  [LED-0603]  65.02,166.62 0 top
D65  PRTR5V0U2F  [SOT886]  65.02,141.22 90 top
D66  WS2812  [WS2812-2020]  64.99,169.83 180 top
D67  1A/23V/620mV  [SOD-323]  86.36,154.36 90 top
D68  Yellow  [LED-0603]  88.39,165.35 0 top
D69  BLUE  [LED-0603]  88.39,167.89 0 top
D70  RED  [LED-0603]  88.39,166.62 0 top
D71  PRTR5V0U2F  [SOT886]  88.39,141.22 90 top
D72  WS2812  [WS2812-2020]  88.36,169.83 180 top
E$1  [FIDUCIAL-1X2]  4.23,190.63 0 top
E$2  [FIDUCIAL-1X2]  4.23,190.63 0 bottom
E$3  [FIDUCIAL-1X2]  102.45,190.63 0 top
E$4  [FIDUCIAL-1X2]  102.45,190.63 0 bottom
E$5  [FIDUCIAL-1.5X3]  4.23,15.75 0 top
E$6  [FIDUCIAL-1.5X3]  4.23,15.75 0 bottom
FD1  FIDUCIALUFIDUCIAL  [FIDUCIAL-MICRO]  28.96,63.75 0 top
FD2  FIDUCIALUFIDUCIAL  [FIDUCIAL-MICRO]  28.96,63.75 0 bottom
FD3  FIDUCIALUFIDUCIAL  [FIDUCIAL-MICRO]  7.6,13.54 0 top
FD4  FIDUCIALUFIDUCIAL  [FIDUCIAL-MICRO]  7.6,13.54 0 bottom
FD5  FIDUCIALUFIDUCIAL  [FIDUCIAL-MICRO]  52.32,63.75 0 top
FD6  FIDUCIALUFIDUCIAL  [FIDUCIAL-MICRO]  52.32,63.75 0 bottom
FD7  FIDUCIALUFIDUCIAL  [FIDUCIAL-MICRO]  30.97,13.54 0 top
FD8  FIDUCIALUFIDUCIAL  [FIDUCIAL-MICRO]  30.97,13.54 0 bottom
FD9  FIDUCIALUFIDUCIAL  [FIDUCIAL-MICRO]  75.69,63.75 0 top
FD10  FIDUCIALUFIDUCIAL  [FIDUCIAL-MICRO]  75.69,63.75 0 bottom
FD11  FIDUCIALUFIDUCIAL  [FIDUCIAL-MICRO]  54.34,13.54 0 top
FD12  FIDUCIALUFIDUCIAL  [FIDUCIAL-MICRO]  54.34,13.54 0 bottom
FD13  FIDUCIALUFIDUCIAL  [FIDUCIAL-MICRO]  99.06,63.75 0 top
FD14  FIDUCIALUFIDUCIAL  [FIDUCIAL-MICRO]  99.06,63.75 0 bottom
FD15  FIDUCIALUFIDUCIAL  [FIDUCIAL-MICRO]  77.71,13.54 0 top
FD16  FIDUCIALUFIDUCIAL  [FIDUCIAL-MICRO]  77.71,13.54 0 bottom
FD17  FIDUCIALUFIDUCIAL  [FIDUCIAL-MICRO]  28.96,125.22 0 top
FD18  FIDUCIALUFIDUCIAL  [FIDUCIAL-MICRO]  28.96,125.22 0 bottom
FD19  FIDUCIALUFIDUCIAL  [FIDUCIAL-MICRO]  7.6,75.01 0 top
FD20  FIDUCIALUFIDUCIAL  [FIDUCIAL-MICRO]  7.6,75.01 0 bottom
FD21  FIDUCIALUFIDUCIAL  [FIDUCIAL-MICRO]  52.32,125.22 0 top
FD22  FIDUCIALUFIDUCIAL  [FIDUCIAL-MICRO]  52.32,125.22 0 bottom
FD23  FIDUCIALUFIDUCIAL  [FIDUCIAL-MICRO]  30.97,75.01 0 top
FD24  FIDUCIALUFIDUCIAL  [FIDUCIAL-MICRO]  30.97,75.01 0 bottom
FD25  FIDUCIALUFIDUCIAL  [FIDUCIAL-MICRO]  75.69,125.22 0 top
FD26  FIDUCIALUFIDUCIAL  [FIDUCIAL-MICRO]  75.69,125.22 0 bottom
FD27  FIDUCIALUFIDUCIAL  [FIDUCIAL-MICRO]  54.34,75.01 0 top
FD28  FIDUCIALUFIDUCIAL  [FIDUCIAL-MICRO]  54.34,75.01 0 bottom
FD29  FIDUCIALUFIDUCIAL  [FIDUCIAL-MICRO]  99.06,125.22 0 top
FD30  FIDUCIALUFIDUCIAL  [FIDUCIAL-MICRO]  99.06,125.22 0 bottom
FD31  FIDUCIALUFIDUCIAL  [FIDUCIAL-MICRO]  77.71,75.01 0 top
FD32  FIDUCIALUFIDUCIAL  [FIDUCIAL-MICRO]  77.71,75.01 0 bottom
FD33  FIDUCIALUFIDUCIAL  [FIDUCIAL-MICRO]  28.96,186.69 0 top
FD34  FIDUCIALUFIDUCIAL  [FIDUCIAL-MICRO]  28.96,186.69 0 bottom
FD35  FIDUCIALUFIDUCIAL  [FIDUCIAL-MICRO]  7.6,136.48 0 top
FD36  FIDUCIALUFIDUCIAL  [FIDUCIAL-MICRO]  7.6,136.48 0 bottom
FD37  FIDUCIALUFIDUCIAL  [FIDUCIAL-MICRO]  52.32,186.69 0 top
FD38  FIDUCIALUFIDUCIAL  [FIDUCIAL-MICRO]  52.32,186.69 0 bottom
FD39  FIDUCIALUFIDUCIAL  [FIDUCIAL-MICRO]  30.97,136.48 0 top
FD40  FIDUCIALUFIDUCIAL  [FIDUCIAL-MICRO]  30.97,136.48 0 bottom
FD41  FIDUCIALUFIDUCIAL  [FIDUCIAL-MICRO]  75.69,186.69 0 top
FD42  FIDUCIALUFIDUCIAL  [FIDUCIAL-MICRO]  75.69,186.69 0 bottom
FD43  FIDUCIALUFIDUCIAL  [FIDUCIAL-MICRO]  54.34,136.48 0 top
FD44  FIDUCIALUFIDUCIAL  [FIDUCIAL-MICRO]  54.34,136.48 0 bottom
FD45  FIDUCIALUFIDUCIAL  [FIDUCIAL-MICRO]  99.06,186.69 0 top
FD46  FIDUCIALUFIDUCIAL  [FIDUCIAL-MICRO]  99.06,186.69 0 bottom
FD47  FIDUCIALUFIDUCIAL  [FIDUCIAL-MICRO]  77.71,136.48 0 top
FD48  FIDUCIALUFIDUCIAL  [FIDUCIAL-MICRO]  77.71,136.48 0 bottom
H1  STAND-OFF  [STAND-OFF]  9.4,11.94 0 top
H2  STAND-OFF  [STAND-OFF]  27.18,11.94 0 top
H3  STAND-OFF  [STAND-OFF]  9.4,65.28 90 top
H4  STAND-OFF  [STAND-OFF]  27.18,65.28 90 top
H5  STAND-OFF  [STAND-OFF]  32.77,11.94 0 top
H6  STAND-OFF  [STAND-OFF]  50.55,11.94 0 top
H7  STAND-OFF  [STAND-OFF]  32.77,65.28 90 top
H8  STAND-OFF  [STAND-OFF]  50.55,65.28 90 top
H9  STAND-OFF  [STAND-OFF]  56.13,11.94 0 top
H10  STAND-OFF  [STAND-OFF]  73.91,11.94 0 top
H11  STAND-OFF  [STAND-OFF]  56.13,65.28 90 top
H12  STAND-OFF  [STAND-OFF]  73.91,65.28 90 top
H13  STAND-OFF  [STAND-OFF]  79.5,11.94 0 top
H14  STAND-OFF  [STAND-OFF]  97.28,11.94 0 top
H15  STAND-OFF  [STAND-OFF]  79.5,65.28 90 top
H16  STAND-OFF  [STAND-OFF]  97.28,65.28 90 top
H17  STAND-OFF  [STAND-OFF]  9.4,73.41 0 top
H18  STAND-OFF  [STAND-OFF]  27.18,73.41 0 top
H19  STAND-OFF  [STAND-OFF]  9.4,126.75 90 top
H20  STAND-OFF  [STAND-OFF]  27.18,126.75 90 top
H21  STAND-OFF  [STAND-OFF]  32.77,73.41 0 top
H22  STAND-OFF  [STAND-OFF]  50.55,73.41 0 top
H23  STAND-OFF  [STAND-OFF]  32.77,126.75 90 top
H24  STAND-OFF  [STAND-OFF]  50.55,126.75 90 top
H25  STAND-OFF  [STAND-OFF]  56.13,73.41 0 top
H26  STAND-OFF  [STAND-OFF]  73.91,73.41 0 top
H27  STAND-OFF  [STAND-OFF]  56.13,126.75 90 top
H28  STAND-OFF  [STAND-OFF]  73.91,126.75 90 top
H29  STAND-OFF  [STAND-OFF]  79.5,73.41 0 top
H30  STAND-OFF  [STAND-OFF]  97.28,73.41 0 top
H31  STAND-OFF  [STAND-OFF]  79.5,126.75 90 top
H32  STAND-OFF  [STAND-OFF]  97.28,126.75 90 top
H33  STAND-OFF  [STAND-OFF]  9.4,134.87 0 top
H34  STAND-OFF  [STAND-OFF]  27.18,134.87 0 top
H35  STAND-OFF  [STAND-OFF]  9.4,188.21 90 top
H36  STAND-OFF  [STAND-OFF]  27.18,188.21 90 top
H37  STAND-OFF  [STAND-OFF]  32.77,134.87 0 top
H38  STAND-OFF  [STAND-OFF]  50.55,134.87 0 top
H39  STAND-OFF  [STAND-OFF]  32.77,188.21 90 top
H40  STAND-OFF  [STAND-OFF]  50.55,188.21 90 top
H41  STAND-OFF  [STAND-OFF]  56.13,134.87 0 top
H42  STAND-OFF  [STAND-OFF]  73.91,134.87 0 top
H43  STAND-OFF  [STAND-OFF]  56.13,188.21 90 top
H44  STAND-OFF  [STAND-OFF]  73.91,188.21 90 top
H45  STAND-OFF  [STAND-OFF]  79.5,134.87 0 top
H46  STAND-OFF  [STAND-OFF]  97.28,134.87 0 top
H47  STAND-OFF  [STAND-OFF]  79.5,188.21 90 top
H48  STAND-OFF  [STAND-OFF]  97.28,188.21 90 top
I2C  JUMPER-SMT_3_2-NC_TRACE_SILK  [SMT-JUMPER_3_2-NC_TRACE_SILK]  8.24,17.02 90 bottom
I2C1  JUMPER-SMT_3_2-NC_TRACE_SILK  [SMT-JUMPER_3_2-NC_TRACE_SILK]  31.61,17.02 90 bottom
I2C2  JUMPER-SMT_3_2-NC_TRACE_SILK  [SMT-JUMPER_3_2-NC_TRACE_SILK]  54.98,17.02 90 bottom
I2C3  JUMPER-SMT_3_2-NC_TRACE_SILK  [SMT-JUMPER_3_2-NC_TRACE_SILK]  78.35,17.02 90 bottom
I2C4  JUMPER-SMT_3_2-NC_TRACE_SILK  [SMT-JUMPER_3_2-NC_TRACE_SILK]  8.24,78.48 90 bottom
I2C5  JUMPER-SMT_3_2-NC_TRACE_SILK  [SMT-JUMPER_3_2-NC_TRACE_SILK]  31.61,78.48 90 bottom
I2C6  JUMPER-SMT_3_2-NC_TRACE_SILK  [SMT-JUMPER_3_2-NC_TRACE_SILK]  54.98,78.48 90 bottom
I2C7  JUMPER-SMT_3_2-NC_TRACE_SILK  [SMT-JUMPER_3_2-NC_TRACE_SILK]  78.35,78.48 90 bottom
I2C8  JUMPER-SMT_3_2-NC_TRACE_SILK  [SMT-JUMPER_3_2-NC_TRACE_SILK]  8.24,139.95 90 bottom
I2C9  JUMPER-SMT_3_2-NC_TRACE_SILK  [SMT-JUMPER_3_2-NC_TRACE_SILK]  31.61,139.95 90 bottom
I2C10  JUMPER-SMT_3_2-NC_TRACE_SILK  [SMT-JUMPER_3_2-NC_TRACE_SILK]  54.98,139.95 90 bottom
I2C11  JUMPER-SMT_3_2-NC_TRACE_SILK  [SMT-JUMPER_3_2-NC_TRACE_SILK]  78.35,139.95 90 bottom
J1  THING_PLUS_LOGICAL  [THING_PLUS]  6.86,9.4 0 top
J2  LiPo  [JST-2-SMD]  10.34,27.18 90 top
J3  QWIIC_RIGHT_ANGLE  [JST04_1MM_RA]  11.94,18.8 270 top
J4  SDFRICTION  [MICROSD_TINY]  19,20.14 0 bottom
J5  USB-C  [USB-C-16P-4LAYER-ISOLATED]  18.29,15.49 0 top
J6  SWD (DNP)  [2X5-SMD-UNSHROUDED_DNP_NO_PASTE]  18.73,28.17 270 bottom
J7  LiPo  [JST-2-SMD]  33.71,27.18 90 top
J8  QWIIC_RIGHT_ANGLE  [JST04_1MM_RA]  35.31,18.8 270 top
J9  USB-C  [USB-C-16P-4LAYER-ISOLATED]  41.66,15.49 0 top
J10  THING_PLUS_LOGICAL  [THING_PLUS]  30.23,9.4 0 top
J11  SDFRICTION  [MICROSD_TINY]  42.37,20.14 0 bottom
J12  SWD (DNP)  [2X5-SMD-UNSHROUDED_DNP_NO_PASTE]  42.1,28.17 270 bottom
J13  LiPo  [JST-2-SMD]  57.07,27.18 90 top
J14  QWIIC_RIGHT_ANGLE  [JST04_1MM_RA]  58.67,18.8 270 top
J15  USB-C  [USB-C-16P-4LAYER-ISOLATED]  65.02,15.49 0 top
J16  THING_PLUS_LOGICAL  [THING_PLUS]  53.59,9.4 0 top
J17  SDFRICTION  [MICROSD_TINY]  65.74,20.14 0 bottom
J18  SWD (DNP)  [2X5-SMD-UNSHROUDED_DNP_NO_PASTE]  65.46,28.17 270 bottom
J19  LiPo  [JST-2-SMD]  80.44,27.18 90 top
J20  QWIIC_RIGHT_ANGLE  [JST04_1MM_RA]  82.04,18.8 270 top
J21  USB-C  [USB-C-16P-4LAYER-ISOLATED]  88.39,15.49 0 top
J22  THING_PLUS_LOGICAL  [THING_PLUS]  76.96,9.4 0 top
J23  SDFRICTION  [MICROSD_TINY]  89.1,20.14 0 bottom
J24  SWD (DNP)  [2X5-SMD-UNSHROUDED_DNP_NO_PASTE]  88.83,28.17 270 bottom
J25  LiPo  [JST-2-SMD]  10.34,88.65 90 top
J26  QWIIC_RIGHT_ANGLE  [JST04_1MM_RA]  11.94,80.26 270 top
J27  USB-C  [USB-C-16P-4LAYER-ISOLATED]  18.29,76.96 0 top
J28  THING_PLUS_LOGICAL  [THING_PLUS]  6.86,70.87 0 top
J29  SDFRICTION  [MICROSD_TINY]  19,81.61 0 bottom
J30  SWD (DNP)  [2X5-SMD-UNSHROUDED_DNP_NO_PASTE]  18.73,89.64 270 bottom
J31  LiPo  [JST-2-SMD]  33.71,88.65 90 top
J32  QWIIC_RIGHT_ANGLE  [JST04_1MM_RA]  35.31,80.26 270 top
J33  USB-C  [USB-C-16P-4LAYER-ISOLATED]  41.66,76.96 0 top
J34  THING_PLUS_LOGICAL  [THING_PLUS]  30.23,70.87 0 top
J35  SDFRICTION  [MICROSD_TINY]  42.37,81.61 0 bottom
J36  SWD (DNP)  [2X5-SMD-UNSHROUDED_DNP_NO_PASTE]  42.1,89.64 270 bottom
J37  LiPo  [JST-2-SMD]  57.07,88.65 90 top
J38  QWIIC_RIGHT_ANGLE  [JST04_1MM_RA]  58.67,80.26 270 top
J39  USB-C  [USB-C-16P-4LAYER-ISOLATED]  65.02,76.96 0 top
J40  THING_PLUS_LOGICAL  [THING_PLUS]  53.59,70.87 0 top
J41  SDFRICTION  [MICROSD_TINY]  65.74,81.61 0 bottom
J42  SWD (DNP)  [2X5-SMD-UNSHROUDED_DNP_NO_PASTE]  65.46,89.64 270 bottom
J43  LiPo  [JST-2-SMD]  80.44,88.65 90 top
J44  QWIIC_RIGHT_ANGLE  [JST04_1MM_RA]  82.04,80.26 270 top
J45  USB-C  [USB-C-16P-4LAYER-ISOLATED]  88.39,76.96 0 top
J46  THING_PLUS_LOGICAL  [THING_PLUS]  76.96,70.87 0 top
J47  SDFRICTION  [MICROSD_TINY]  89.1,81.61 0 bottom
J48  SWD (DNP)  [2X5-SMD-UNSHROUDED_DNP_NO_PASTE]  88.83,89.64 270 bottom
J49  LiPo  [JST-2-SMD]  10.34,150.11 90 top
J50  QWIIC_RIGHT_ANGLE  [JST04_1MM_RA]  11.94,141.73 270 top
J51  USB-C  [USB-C-16P-4LAYER-ISOLATED]  18.29,138.43 0 top
J52  THING_PLUS_LOGICAL  [THING_PLUS]  6.86,132.33 0 top
J53  SDFRICTION  [MICROSD_TINY]  19,143.08 0 bottom
J54  SWD (DNP)  [2X5-SMD-UNSHROUDED_DNP_NO_PASTE]  18.73,151.11 270 bottom
J55  LiPo  [JST-2-SMD]  33.71,150.11 90 top
J56  QWIIC_RIGHT_ANGLE  [JST04_1MM_RA]  35.31,141.73 270 top
J57  USB-C  [USB-C-16P-4LAYER-ISOLATED]  41.66,138.43 0 top
J58  THING_PLUS_LOGICAL  [THING_PLUS]  30.23,132.33 0 top
J59  SDFRICTION  [MICROSD_TINY]  42.37,143.08 0 bottom
J60  SWD (DNP)  [2X5-SMD-UNSHROUDED_DNP_NO_PASTE]  42.1,151.11 270 bottom
J61  LiPo  [JST-2-SMD]  57.07,150.11 90 top
J62  QWIIC_RIGHT_ANGLE  [JST04_1MM_RA]  58.67,141.73 270 top
J63  USB-C  [USB-C-16P-4LAYER-ISOLATED]  65.02,138.43 0 top
J64  THING_PLUS_LOGICAL  [THING_PLUS]  53.59,132.33 0 top
J65  SDFRICTION  [MICROSD_TINY]  65.74,143.08 0 bottom
J66  SWD (DNP)  [2X5-SMD-UNSHROUDED_DNP_NO_PASTE]  65.46,151.11 270 bottom
J67  LiPo  [JST-2-SMD]  80.44,150.11 90 top
J68  QWIIC_RIGHT_ANGLE  [JST04_1MM_RA]  82.04,141.73 270 top
J69  USB-C  [USB-C-16P-4LAYER-ISOLATED]  88.39,138.43 0 top
J70  THING_PLUS_LOGICAL  [THING_PLUS]  76.96,132.33 0 top
J71  SDFRICTION  [MICROSD_TINY]  89.1,143.08 0 bottom
J72  SWD (DNP)  [2X5-SMD-UNSHROUDED_DNP_NO_PASTE]  88.83,151.11 270 bottom
JP1  [SMT-JUMPER_2_NC_TRACE_SILK]  14.92,45.34 90 bottom
JP2  [SMT-JUMPER_2_NC_TRACE_SILK]  12.63,43.27 90 bottom
JP3  [SMT-JUMPER_2_NC_TRACE_SILK]  19.56,47.69 180 bottom
JP4  [SMT-JUMPER_2_NC_TRACE_SILK]  38.29,45.34 90 bottom
JP5  [SMT-JUMPER_2_NC_TRACE_SILK]  36,43.27 90 bottom
JP6  [SMT-JUMPER_2_NC_TRACE_SILK]  42.92,47.69 180 bottom
JP7  [SMT-JUMPER_2_NC_TRACE_SILK]  61.66,45.34 90 bottom
JP8  [SMT-JUMPER_2_NC_TRACE_SILK]  59.37,43.27 90 bottom
JP9  [SMT-JUMPER_2_NC_TRACE_SILK]  66.29,47.69 180 bottom
JP10  [SMT-JUMPER_2_NC_TRACE_SILK]  85.02,45.34 90 bottom
JP11  [SMT-JUMPER_2_NC_TRACE_SILK]  82.74,43.27 90 bottom
JP12  [SMT-JUMPER_2_NC_TRACE_SILK]  89.66,47.69 180 bottom
JP13  [SMT-JUMPER_2_NC_TRACE_SILK]  14.92,106.81 90 bottom
JP14  [SMT-JUMPER_2_NC_TRACE_SILK]  12.63,104.73 90 bottom
JP15  [SMT-JUMPER_2_NC_TRACE_SILK]  19.56,109.16 180 bottom
JP16  [SMT-JUMPER_2_NC_TRACE_SILK]  38.29,106.81 90 bottom
JP17  [SMT-JUMPER_2_NC_TRACE_SILK]  36,104.73 90 bottom
JP18  [SMT-JUMPER_2_NC_TRACE_SILK]  42.92,109.16 180 bottom
JP19  [SMT-JUMPER_2_NC_TRACE_SILK]  61.66,106.81 90 bottom
JP20  [SMT-JUMPER_2_NC_TRACE_SILK]  59.37,104.73 90 bottom
JP21  [SMT-JUMPER_2_NC_TRACE_SILK]  66.29,109.16 180 bottom
JP22  [SMT-JUMPER_2_NC_TRACE_SILK]  85.02,106.81 90 bottom
JP23  [SMT-JUMPER_2_NC_TRACE_SILK]  82.74,104.73 90 bottom
JP24  [SMT-JUMPER_2_NC_TRACE_SILK]  89.66,109.16 180 bottom
JP25  [SMT-JUMPER_2_NC_TRACE_SILK]  14.92,168.28 90 bottom
JP26  [SMT-JUMPER_2_NC_TRACE_SILK]  12.63,166.2 90 bottom
JP27  [SMT-JUMPER_2_NC_TRACE_SILK]  19.56,170.63 180 bottom
JP28  [SMT-JUMPER_2_NC_TRACE_SILK]  38.29,168.28 90 bottom
JP29  [SMT-JUMPER_2_NC_TRACE_SILK]  36,166.2 90 bottom
JP30  [SMT-JUMPER_2_NC_TRACE_SILK]  42.92,170.63 180 bottom
JP31  [SMT-JUMPER_2_NC_TRACE_SILK]  61.66,168.28 90 bottom
JP32  [SMT-JUMPER_2_NC_TRACE_SILK]  59.37,166.2 90 bottom
JP33  [SMT-JUMPER_2_NC_TRACE_SILK]  66.29,170.63 180 bottom
JP34  [SMT-JUMPER_2_NC_TRACE_SILK]  85.02,168.28 90 bottom
JP35  [SMT-JUMPER_2_NC_TRACE_SILK]  82.74,166.2 90 bottom
JP36  [SMT-JUMPER_2_NC_TRACE_SILK]  89.66,170.63 180 bottom
LED  [SMT-JUMPER_2_NC_TRACE_SILK]  17.2,42.12 0 bottom
LED1  [SMT-JUMPER_2_NC_TRACE_SILK]  40.56,42.12 0 bottom
LED2  [SMT-JUMPER_2_NC_TRACE_SILK]  63.93,42.12 0 bottom
LED3  [SMT-JUMPER_2_NC_TRACE_SILK]  87.3,42.12 0 bottom
LED4  [SMT-JUMPER_2_NC_TRACE_SILK]  17.2,103.59 0 bottom
LED5  [SMT-JUMPER_2_NC_TRACE_SILK]  40.56,103.59 0 bottom
LED6  [SMT-JUMPER_2_NC_TRACE_SILK]  63.93,103.59 0 bottom
LED7  [SMT-JUMPER_2_NC_TRACE_SILK]  87.3,103.59 0 bottom
LED8  [SMT-JUMPER_2_NC_TRACE_SILK]  17.2,165.05 0 bottom
LED9  [SMT-JUMPER_2_NC_TRACE_SILK]  40.56,165.05 0 bottom
LED10  [SMT-JUMPER_2_NC_TRACE_SILK]  63.93,165.05 0 bottom
LED11  [SMT-JUMPER_2_NC_TRACE_SILK]  87.3,165.05 0 bottom
LOGO1  OSHW-LOGOM  [OSHW-LOGO-M]  41.66,52.58 0 bottom
LOGO2  OSHW-LOGOM  [OSHW-LOGO-M]  18.29,52.58 0 bottom
LOGO3  SFE_LOGO_NAME_FLAME.1_INCH  [SFE_LOGO_NAME_FLAME_.1]  22.73,37.93 90 bottom
LOGO4  QWIIC_LOGO_4MM  [QWIIC_4MM]  34.73,15.07 0 top
LOGO5  SFE_LOGO_NAME_FLAME.1_INCH  [SFE_LOGO_NAME_FLAME_.1]  46.1,37.93 90 bottom
LOGO6  QWIIC_LOGO_4MM  [QWIIC_4MM]  11.36,15.07 0 top
LOGO7  OSHW-LOGOM  [OSHW-LOGO-M]  65.02,52.58 0 bottom
LOGO8  QWIIC_LOGO_4MM  [QWIIC_4MM]  58.1,15.07 0 top
LOGO9  SFE_LOGO_NAME_FLAME.1_INCH  [SFE_LOGO_NAME_FLAME_.1]  69.46,37.93 90 bottom
LOGO10  OSHW-LOGOM  [OSHW-LOGO-M]  88.39,52.58 0 bottom
LOGO11  QWIIC_LOGO_4MM  [QWIIC_4MM]  81.47,15.07 0 top
LOGO12  SFE_LOGO_NAME_FLAME.1_INCH  [SFE_LOGO_NAME_FLAME_.1]  92.83,37.93 90 bottom
LOGO13  OSHW-LOGOM  [OSHW-LOGO-M]  18.29,114.05 0 bottom
LOGO14  QWIIC_LOGO_4MM  [QWIIC_4MM]  11.36,76.54 0 top
LOGO15  SFE_LOGO_NAME_FLAME.1_INCH  [SFE_LOGO_NAME_FLAME_.1]  22.73,99.4 90 bottom
LOGO16  OSHW-LOGOM  [OSHW-LOGO-M]  41.66,114.05 0 bottom
LOGO17  QWIIC_LOGO_4MM  [QWIIC_4MM]  34.73,76.54 0 top
LOGO18  SFE_LOGO_NAME_FLAME.1_INCH  [SFE_LOGO_NAME_FLAME_.1]  46.1,99.4 90 bottom
LOGO19  OSHW-LOGOM  [OSHW-LOGO-M]  65.02,114.05 0 bottom
LOGO20  QWIIC_LOGO_4MM  [QWIIC_4MM]  58.1,76.54 0 top
LOGO21  SFE_LOGO_NAME_FLAME.1_INCH  [SFE_LOGO_NAME_FLAME_.1]  69.46,99.4 90 bottom
LOGO22  OSHW-LOGOM  [OSHW-LOGO-M]  88.39,114.05 0 bottom
LOGO23  QWIIC_LOGO_4MM  [QWIIC_4MM]  81.47,76.54 0 top
LOGO24  SFE_LOGO_NAME_FLAME.1_INCH  [SFE_LOGO_NAME_FLAME_.1]  92.83,99.4 90 bottom
LOGO25  OSHW-LOGOM  [OSHW-LOGO-M]  18.29,175.51 0 bottom
LOGO26  QWIIC_LOGO_4MM  [QWIIC_4MM]  11.36,138.01 0 top
LOGO27  SFE_LOGO_NAME_FLAME.1_INCH  [SFE_LOGO_NAME_FLAME_.1]  22.73,160.87 90 bottom
LOGO28  OSHW-LOGOM  [OSHW-LOGO-M]  41.66,175.51 0 bottom
LOGO29  QWIIC_LOGO_4MM  [QWIIC_4MM]  34.73,138.01 0 top
LOGO30  SFE_LOGO_NAME_FLAME.1_INCH  [SFE_LOGO_NAME_FLAME_.1]  46.1,160.87 90 bottom
LOGO31  OSHW-LOGOM  [OSHW-LOGO-M]  65.02,175.51 0 bottom
LOGO32  QWIIC_LOGO_4MM  [QWIIC_4MM]  58.1,138.01 0 top
LOGO33  SFE_LOGO_NAME_FLAME.1_INCH  [SFE_LOGO_NAME_FLAME_.1]  69.46,160.87 90 bottom
LOGO34  OSHW-LOGOM  [OSHW-LOGO-M]  88.39,175.51 0 bottom
LOGO35  QWIIC_LOGO_4MM  [QWIIC_4MM]  81.47,138.01 0 top
LOGO36  SFE_LOGO_NAME_FLAME.1_INCH  [SFE_LOGO_NAME_FLAME_.1]  92.83,160.87 90 bottom
MEAS  [COMBO-JUMPER_2_NC_TRACE]  13.23,32.41 0 bottom
MEAS1  [COMBO-JUMPER_2_NC_TRACE]  36.6,32.41 0 bottom
MEAS2  [COMBO-JUMPER_2_NC_TRACE]  59.97,32.41 0 bottom
MEAS3  [COMBO-JUMPER_2_NC_TRACE]  83.34,32.41 0 bottom
MEAS4  [COMBO-JUMPER_2_NC_TRACE]  13.23,93.88 0 bottom
MEAS5  [COMBO-JUMPER_2_NC_TRACE]  36.6,93.88 0 bottom
MEAS6  [COMBO-JUMPER_2_NC_TRACE]  59.97,93.88 0 bottom
MEAS7  [COMBO-JUMPER_2_NC_TRACE]  83.34,93.88 0 bottom
MEAS8  [COMBO-JUMPER_2_NC_TRACE]  13.23,155.35 0 bottom
MEAS9  [COMBO-JUMPER_2_NC_TRACE]  36.6,155.35 0 bottom
MEAS10  [COMBO-JUMPER_2_NC_TRACE]  59.97,155.35 0 bottom
MEAS11  [COMBO-JUMPER_2_NC_TRACE]  83.34,155.35 0 bottom
Q1  20V/4.2A/52mΩ/1.4W  [SOT23-3]  18.85,29.24 180 top
Q2  MBT3904DW1T1  [SC70-6]  24.33,32.01 270 top
Q3  20V/4.2A/52mΩ/1.4W  [SOT23-3]  12.18,27.04 180 bottom
Q4  20V/4.2A/52mΩ/1.4W  [SOT23-3]  27.65,18.17 0 bottom
Q5  20V/0.2A/8MHz/1.2Ω/1Vth  [SOT-416FL]  25.56,16.02 90 bottom
Q6  20V/4.2A/52mΩ/1.4W  [SOT23-3]  42.21,29.24 180 top
Q7  MBT3904DW1T1  [SC70-6]  47.7,32.01 270 top
Q8  20V/4.2A/52mΩ/1.4W  [SOT23-3]  35.55,27.04 180 bottom
Q9  20V/4.2A/52mΩ/1.4W  [SOT23-3]  51.02,18.17 0 bottom
Q10  20V/0.2A/8MHz/1.2Ω/1Vth  [SOT-416FL]  48.93,16.02 90 bottom
Q11  20V/4.2A/52mΩ/1.4W  [SOT23-3]  65.58,29.24 180 top
Q12  MBT3904DW1T1  [SC70-6]  71.07,32.01 270 top
Q13  20V/4.2A/52mΩ/1.4W  [SOT23-3]  58.92,27.04 180 bottom
Q14  20V/4.2A/52mΩ/1.4W  [SOT23-3]  74.39,18.17 0 bottom
Q15  20V/0.2A/8MHz/1.2Ω/1Vth  [SOT-416FL]  72.3,16.02 90 bottom
Q16  20V/4.2A/52mΩ/1.4W  [SOT23-3]  88.95,29.24 180 top
Q17  MBT3904DW1T1  [SC70-6]  94.43,32.01 270 top
Q18  20V/4.2A/52mΩ/1.4W  [SOT23-3]  82.29,27.04 180 bottom
Q19  20V/4.2A/52mΩ/1.4W  [SOT23-3]  97.76,18.17 0 bottom
Q20  20V/0.2A/8MHz/1.2Ω/1Vth  [SOT-416FL]  95.66,16.02 90 bottom
Q21  20V/4.2A/52mΩ/1.4W  [SOT23-3]  18.85,90.7 180 top
Q22  MBT3904DW1T1  [SC70-6]  24.33,93.48 270 top
Q23  20V/4.2A/52mΩ/1.4W  [SOT23-3]  12.18,88.51 180 bottom
Q24  20V/4.2A/52mΩ/1.4W  [SOT23-3]  27.65,79.64 0 bottom
Q25  20V/0.2A/8MHz/1.2Ω/1Vth  [SOT-416FL]  25.56,77.49 90 bottom
Q26  20V/4.2A/52mΩ/1.4W  [SOT23-3]  42.21,90.7 180 top
Q27  MBT3904DW1T1  [SC70-6]  47.7,93.48 270 top
Q28  20V/4.2A/52mΩ/1.4W  [SOT23-3]  35.55,88.51 180 bottom
Q29  20V/4.2A/52mΩ/1.4W  [SOT23-3]  51.02,79.64 0 bottom
Q30  20V/0.2A/8MHz/1.2Ω/1Vth  [SOT-416FL]  48.93,77.49 90 bottom
Q31  20V/4.2A/52mΩ/1.4W  [SOT23-3]  65.58,90.7 180 top
Q32  MBT3904DW1T1  [SC70-6]  71.07,93.48 270 top
Q33  20V/4.2A/52mΩ/1.4W  [SOT23-3]  58.92,88.51 180 bottom
Q34  20V/4.2A/52mΩ/1.4W  [SOT23-3]  74.39,79.64 0 bottom
Q35  20V/0.2A/8MHz/1.2Ω/1Vth  [SOT-416FL]  72.3,77.49 90 bottom
Q36  20V/4.2A/52mΩ/1.4W  [SOT23-3]  88.95,90.7 180 top
Q37  MBT3904DW1T1  [SC70-6]  94.43,93.48 270 top
Q38  20V/4.2A/52mΩ/1.4W  [SOT23-3]  82.29,88.51 180 bottom
Q39  20V/4.2A/52mΩ/1.4W  [SOT23-3]  97.76,79.64 0 bottom
Q40  20V/0.2A/8MHz/1.2Ω/1Vth  [SOT-416FL]  95.66,77.49 90 bottom
Q41  20V/4.2A/52mΩ/1.4W  [SOT23-3]  18.85,152.17 180 top
Q42  MBT3904DW1T1  [SC70-6]  24.33,154.95 270 top
Q43  20V/4.2A/52mΩ/1.4W  [SOT23-3]  12.18,149.97 180 bottom
Q44  20V/4.2A/52mΩ/1.4W  [SOT23-3]  27.65,141.11 0 bottom
Q45  20V/0.2A/8MHz/1.2Ω/1Vth  [SOT-416FL]  25.56,138.95 90 bottom
Q46  20V/4.2A/52mΩ/1.4W  [SOT23-3]  42.21,152.17 180 top
Q47  MBT3904DW1T1  [SC70-6]  47.7,154.95 270 top
Q48  20V/4.2A/52mΩ/1.4W  [SOT23-3]  35.55,149.97 180 bottom
Q49  20V/4.2A/52mΩ/1.4W  [SOT23-3]  51.02,141.11 0 bottom
Q50  20V/0.2A/8MHz/1.2Ω/1Vth  [SOT-416FL]  48.93,138.95 90 bottom
Q51  20V/4.2A/52mΩ/1.4W  [SOT23-3]  65.58,152.17 180 top
Q52  MBT3904DW1T1  [SC70-6]  71.07,154.95 270 top
Q53  20V/4.2A/52mΩ/1.4W  [SOT23-3]  58.92,149.97 180 bottom
Q54  20V/4.2A/52mΩ/1.4W  [SOT23-3]  74.39,141.11 0 bottom
Q55  20V/0.2A/8MHz/1.2Ω/1Vth  [SOT-416FL]  72.3,138.95 90 bottom
Q56  20V/4.2A/52mΩ/1.4W  [SOT23-3]  88.95,152.17 180 top
Q57  MBT3904DW1T1  [SC70-6]  94.43,154.95 270 top
Q58  20V/4.2A/52mΩ/1.4W  [SOT23-3]  82.29,149.97 180 bottom
Q59  20V/4.2A/52mΩ/1.4W  [SOT23-3]  97.76,141.11 0 bottom
Q60  20V/0.2A/8MHz/1.2Ω/1Vth  [SOT-416FL]  95.66,138.95 90 bottom
R1  10k  [0402-TIGHT]  26.69,24.41 270 top
R2  4.7k  [0402-TIGHT]  15.75,41.38 0 top
R3  4.7k  [0402-TIGHT]  18.29,41.15 180 top
R4  4.7k  [0402-TIGHT]  15.19,43.48 0 top
R5  22k  [0402-TIGHT]  26.69,22.41 90 top
R6  2.0k  [0603]  17.05,34.86 180 top
R7  100k  [0402-TIGHT]  18.55,32.62 180 top
R8  100k  [0402-TIGHT]  10.32,37.28 180 top
R9  33k  [0402-TIGHT]  26.71,20.3 90 top
R10  100  [0402-TIGHT]  18.53,31.65 0 top
R11  5.1k  [0402-TIGHT]  21.2,18.71 270 top
R12  5.1k  [0402-TIGHT]  17.01,23.49 270 top
R13  10k  [0402-TIGHT]  17.09,33.6 0 top
R14  100  [0402-TIGHT]  11.74,29.5 0 bottom
R15  1k  [0402-TIGHT]  15.95,23.49 270 top
R16  100k  [0402-TIGHT]  10.53,22.21 270 bottom
R17  10k  [0402-TIGHT]  24.31,34.13 0 top
R18  10k  [0402-TIGHT]  24.31,30.26 180 top
R19  100k  [0402-TIGHT]  14.46,27.54 270 bottom
R20  100k  [0402-TIGHT]  26.95,16 180 bottom
R21  100  [0402-TIGHT]  28.63,15.54 270 bottom
R22  1k  [0402-TIGHT]  10.5,24.59 270 bottom
R23  100  [0402-TIGHT]  25.08,14.68 0 bottom
R24  100k  [0402-TIGHT]  41.92,32.62 180 top
R25  4.7k  [0402-TIGHT]  41.66,41.15 180 top
R26  2.0k  [0603]  40.42,34.86 180 top
R27  10k  [0402-TIGHT]  50.06,24.41 270 top
R28  2.2k  [0402-TIGHT]  11.33,16.4 0 bottom
R29  2.2k  [0402-TIGHT]  11.36,15.31 0 bottom
R30  4.7k  [0402-TIGHT]  38.56,43.48 0 top
R31  100k  [0402-TIGHT]  33.69,37.28 180 top
R32  22k  [0402-TIGHT]  50.06,22.41 90 top
R33  33k  [0402-TIGHT]  50.08,20.3 90 top
R34  5.1k  [0402-TIGHT]  44.56,18.71 270 top
R35  5.1k  [0402-TIGHT]  40.38,23.49 270 top
R36  10k  [0402-TIGHT]  40.46,33.6 0 top
R37  100  [0402-TIGHT]  41.9,31.65 0 top
R38  1k  [0402-TIGHT]  39.32,23.49 270 top
R39  10k  [0402-TIGHT]  47.68,34.13 0 top
R40  10k  [0402-TIGHT]  47.68,30.26 180 top
R41  4.7k  [0402-TIGHT]  39.12,41.38 0 top
R42  2.2k  [0402-TIGHT]  34.7,16.4 0 bottom
R43  2.2k  [0402-TIGHT]  34.73,15.31 0 bottom
R44  100  [0402-TIGHT]  35.11,29.5 0 bottom
R45  100k  [0402-TIGHT]  37.83,27.54 270 bottom
R46  100k  [0402-TIGHT]  33.89,22.21 270 bottom
R47  100k  [0402-TIGHT]  50.32,16 180 bottom
R48  100  [0402-TIGHT]  52,15.54 270 bottom
R49  1k  [0402-TIGHT]  33.86,24.59 270 bottom
R50  100  [0402-TIGHT]  48.45,14.68 0 bottom
R51  100k  [0402-TIGHT]  65.28,32.62 180 top
R52  4.7k  [0402-TIGHT]  65.02,41.15 180 top
R53  2.0k  [0603]  63.79,34.86 180 top
R54  10k  [0402-TIGHT]  73.42,24.41 270 top
R55  4.7k  [0402-TIGHT]  61.93,43.48 0 top
R56  100k  [0402-TIGHT]  57.05,37.28 180 top
R57  22k  [0402-TIGHT]  73.43,22.41 90 top
R58  33k  [0402-TIGHT]  73.44,20.3 90 top
R59  5.1k  [0402-TIGHT]  67.93,18.71 270 top
R60  5.1k  [0402-TIGHT]  63.75,23.49 270 top
R61  10k  [0402-TIGHT]  63.83,33.6 0 top
R62  100  [0402-TIGHT]  65.27,31.65 0 top
R63  1k  [0402-TIGHT]  62.68,23.49 270 top
R64  10k  [0402-TIGHT]  71.05,34.13 0 top
R65  10k  [0402-TIGHT]  71.04,30.26 180 top
R66  4.7k  [0402-TIGHT]  62.48,41.38 0 top
R67  2.2k  [0402-TIGHT]  58.06,16.4 0 bottom
R68  2.2k  [0402-TIGHT]  58.09,15.31 0 bottom
R69  100  [0402-TIGHT]  58.48,29.5 0 bottom
R70  100k  [0402-TIGHT]  61.2,27.54 270 bottom
R71  100k  [0402-TIGHT]  57.26,22.21 270 bottom
R72  100k  [0402-TIGHT]  73.69,16 180 bottom
R73  100  [0402-TIGHT]  75.37,15.54 270 bottom
R74  1k  [0402-TIGHT]  57.23,24.59 270 bottom
R75  100  [0402-TIGHT]  71.82,14.68 0 bottom
R76  100k  [0402-TIGHT]  88.65,32.62 180 top
R77  4.7k  [0402-TIGHT]  88.39,41.15 180 top
R78  2.0k  [0603]  87.16,34.86 180 top
R79  10k  [0402-TIGHT]  96.79,24.41 270 top
R80  4.7k  [0402-TIGHT]  85.3,43.48 0 top
R81  100k  [0402-TIGHT]  80.42,37.28 180 top
R82  22k  [0402-TIGHT]  96.79,22.41 90 top
R83  33k  [0402-TIGHT]  96.81,20.3 90 top
R84  5.1k  [0402-TIGHT]  91.3,18.71 270 top
R85  5.1k  [0402-TIGHT]  87.11,23.49 270 top
R86  10k  [0402-TIGHT]  87.2,33.6 0 top
R87  100  [0402-TIGHT]  88.64,31.65 0 top
R88  1k  [0402-TIGHT]  86.05,23.49 270 top
R89  10k  [0402-TIGHT]  94.41,34.13 0 top
R90  10k  [0402-TIGHT]  94.41,30.26 180 top
R91  4.7k  [0402-TIGHT]  85.85,41.38 0 top
R92  2.2k  [0402-TIGHT]  81.43,16.4 0 bottom
R93  2.2k  [0402-TIGHT]  81.46,15.31 0 bottom
R94  100  [0402-TIGHT]  81.84,29.5 0 bottom
R95  100k  [0402-TIGHT]  84.56,27.54 270 bottom
R96  100k  [0402-TIGHT]  80.63,22.21 270 bottom
R97  100k  [0402-TIGHT]  97.05,16 180 bottom
R98  100  [0402-TIGHT]  98.73,15.54 270 bottom
R99  1k  [0402-TIGHT]  80.6,24.59 270 bottom
R100  100  [0402-TIGHT]  95.18,14.68 0 bottom
R101  100k  [0402-TIGHT]  18.55,94.09 180 top
R102  4.7k  [0402-TIGHT]  18.29,102.62 180 top
R103  2.0k  [0603]  17.05,96.33 180 top
R104  10k  [0402-TIGHT]  26.69,85.88 270 top
R105  4.7k  [0402-TIGHT]  15.19,104.95 0 top
R106  100k  [0402-TIGHT]  10.32,98.75 180 top
R107  22k  [0402-TIGHT]  26.69,83.88 90 top
R108  33k  [0402-TIGHT]  26.71,81.77 90 top
R109  5.1k  [0402-TIGHT]  21.2,80.18 270 top
R110  5.1k  [0402-TIGHT]  17.01,84.96 270 top
R111  10k  [0402-TIGHT]  17.09,95.07 0 top
R112  100  [0402-TIGHT]  18.53,93.12 0 top
R113  1k  [0402-TIGHT]  15.95,84.96 270 top
R114  10k  [0402-TIGHT]  24.31,95.6 0 top
R115  10k  [0402-TIGHT]  24.31,91.73 180 top
R116  4.7k  [0402-TIGHT]  15.75,102.85 0 top
R117  2.2k  [0402-TIGHT]  11.33,77.87 0 bottom
R118  2.2k  [0402-TIGHT]  11.36,76.78 0 bottom
R119  100  [0402-TIGHT]  11.74,90.97 0 bottom
R120  100k  [0402-TIGHT]  14.46,89 270 bottom
R121  100k  [0402-TIGHT]  10.53,83.68 270 bottom
R122  100k  [0402-TIGHT]  26.95,77.47 180 bottom
R123  100  [0402-TIGHT]  28.63,77.01 270 bottom
R124  1k  [0402-TIGHT]  10.5,86.06 270 bottom
R125  100  [0402-TIGHT]  25.08,76.15 0 bottom
R126  100k  [0402-TIGHT]  41.92,94.09 180 top
R127  4.7k  [0402-TIGHT]  41.66,102.62 180 top
R128  2.0k  [0603]  40.42,96.33 180 top
R129  10k  [0402-TIGHT]  50.06,85.88 270 top
R130  4.7k  [0402-TIGHT]  38.56,104.95 0 top
R131  100k  [0402-TIGHT]  33.69,98.75 180 top
R132  22k  [0402-TIGHT]  50.06,83.88 90 top
R133  33k  [0402-TIGHT]  50.08,81.77 90 top
R134  5.1k  [0402-TIGHT]  44.56,80.18 270 top
R135  5.1k  [0402-TIGHT]  40.38,84.96 270 top
R136  10k  [0402-TIGHT]  40.46,95.07 0 top
R137  100  [0402-TIGHT]  41.9,93.12 0 top
R138  1k  [0402-TIGHT]  39.32,84.96 270 top
R139  10k  [0402-TIGHT]  47.68,95.6 0 top
R140  10k  [0402-TIGHT]  47.68,91.73 180 top
R141  4.7k  [0402-TIGHT]  39.12,102.85 0 top
R142  2.2k  [0402-TIGHT]  34.7,77.87 0 bottom
R143  2.2k  [0402-TIGHT]  34.73,76.78 0 bottom
R144  100  [0402-TIGHT]  35.11,90.97 0 bottom
R145  100k  [0402-TIGHT]  37.83,89 270 bottom
R146  100k  [0402-TIGHT]  33.89,83.68 270 bottom
R147  100k  [0402-TIGHT]  50.32,77.47 180 bottom
R148  100  [0402-TIGHT]  52,77.01 270 bottom
R149  1k  [0402-TIGHT]  33.86,86.06 270 bottom
R150  100  [0402-TIGHT]  48.45,76.15 0 bottom
R151  100k  [0402-TIGHT]  65.28,94.09 180 top
R152  4.7k  [0402-TIGHT]  65.02,102.62 180 top
R153  2.0k  [0603]  63.79,96.33 180 top
R154  10k  [0402-TIGHT]  73.42,85.88 270 top
R155  4.7k  [0402-TIGHT]  61.93,104.95 0 top
R156  100k  [0402-TIGHT]  57.05,98.75 180 top
R157  22k  [0402-TIGHT]  73.43,83.88 90 top
R158  33k  [0402-TIGHT]  73.44,81.77 90 top
R159  5.1k  [0402-TIGHT]  67.93,80.18 270 top
R160  5.1k  [0402-TIGHT]  63.75,84.96 270 top
R161  10k  [0402-TIGHT]  63.83,95.07 0 top
R162  100  [0402-TIGHT]  65.27,93.12 0 top
R163  1k  [0402-TIGHT]  62.68,84.96 270 top
R164  10k  [0402-TIGHT]  71.05,95.6 0 top
R165  10k  [0402-TIGHT]  71.04,91.73 180 top
R166  4.7k  [0402-TIGHT]  62.48,102.85 0 top
R167  2.2k  [0402-TIGHT]  58.06,77.87 0 bottom
R168  2.2k  [0402-TIGHT]  58.09,76.78 0 bottom
R169  100  [0402-TIGHT]  58.48,90.97 0 bottom
R170  100k  [0402-TIGHT]  61.2,89 270 bottom
R171  100k  [0402-TIGHT]  57.26,83.68 270 bottom
R172  100k  [0402-TIGHT]  73.69,77.47 180 bottom
R173  100  [0402-TIGHT]  75.37,77.01 270 bottom
R174  1k  [0402-TIGHT]  57.23,86.06 270 bottom
R175  100  [0402-TIGHT]  71.82,76.15 0 bottom
R176  100k  [0402-TIGHT]  88.65,94.09 180 top
R177  4.7k  [0402-TIGHT]  88.39,102.62 180 top
R178  2.0k  [0603]  87.16,96.33 180 top
R179  10k  [0402-TIGHT]  96.79,85.88 270 top
R180  4.7k  [0402-TIGHT]  85.3,104.95 0 top
R181  100k  [0402-TIGHT]  80.42,98.75 180 top
R182  22k  [0402-TIGHT]  96.79,83.88 90 top
R183  33k  [0402-TIGHT]  96.81,81.77 90 top
R184  5.1k  [0402-TIGHT]  91.3,80.18 270 top
R185  5.1k  [0402-TIGHT]  87.11,84.96 270 top
R186  10k  [0402-TIGHT]  87.2,95.07 0 top
R187  100  [0402-TIGHT]  88.64,93.12 0 top
R188  1k  [0402-TIGHT]  86.05,84.96 270 top
R189  10k  [0402-TIGHT]  94.41,95.6 0 top
R190  10k  [0402-TIGHT]  94.41,91.73 180 top
R191  4.7k  [0402-TIGHT]  85.85,102.85 0 top
R192  2.2k  [0402-TIGHT]  81.43,77.87 0 bottom
R193  2.2k  [0402-TIGHT]  81.46,76.78 0 bottom
R194  100  [0402-TIGHT]  81.84,90.97 0 bottom
R195  100k  [0402-TIGHT]  84.56,89 270 bottom
R196  100k  [0402-TIGHT]  80.63,83.68 270 bottom
R197  100k  [0402-TIGHT]  97.05,77.47 180 bottom
R198  100  [0402-TIGHT]  98.73,77.01 270 bottom
R199  1k  [0402-TIGHT]  80.6,86.06 270 bottom
R200  100  [0402-TIGHT]  95.18,76.15 0 bottom
R201  100k  [0402-TIGHT]  18.55,155.55 180 top
R202  4.7k  [0402-TIGHT]  18.29,164.08 180 top
R203  2.0k  [0603]  17.05,157.8 180 top
R204  10k  [0402-TIGHT]  26.69,147.35 270 top
R205  4.7k  [0402-TIGHT]  15.19,166.41 0 top
R206  100k  [0402-TIGHT]  10.32,160.22 180 top
R207  22k  [0402-TIGHT]  26.69,145.35 90 top
R208  33k  [0402-TIGHT]  26.71,143.24 90 top
R209  5.1k  [0402-TIGHT]  21.2,141.65 270 top
R210  5.1k  [0402-TIGHT]  17.01,146.43 270 top
R211  10k  [0402-TIGHT]  17.09,156.54 0 top
R212  100  [0402-TIGHT]  18.53,154.59 0 top
R213  1k  [0402-TIGHT]  15.95,146.43 270 top
R214  10k  [0402-TIGHT]  24.31,157.06 0 top
R215  10k  [0402-TIGHT]  24.31,153.2 180 top
R216  4.7k  [0402-TIGHT]  15.75,164.32 0 top
R217  2.2k  [0402-TIGHT]  11.33,139.34 0 bottom
R218  2.2k  [0402-TIGHT]  11.36,138.25 0 bottom
R219  100  [0402-TIGHT]  11.74,152.43 0 bottom
R220  100k  [0402-TIGHT]  14.46,150.47 270 bottom
R221  100k  [0402-TIGHT]  10.53,145.14 270 bottom
R222  100k  [0402-TIGHT]  26.95,138.94 180 bottom
R223  100  [0402-TIGHT]  28.63,138.47 270 bottom
R224  1k  [0402-TIGHT]  10.5,147.52 270 bottom
R225  100  [0402-TIGHT]  25.08,137.62 0 bottom
R226  100k  [0402-TIGHT]  41.92,155.55 180 top
R227  4.7k  [0402-TIGHT]  41.66,164.08 180 top
R228  2.0k  [0603]  40.42,157.8 180 top
R229  10k  [0402-TIGHT]  50.06,147.35 270 top
R230  4.7k  [0402-TIGHT]  38.56,166.41 0 top
R231  100k  [0402-TIGHT]  33.69,160.22 180 top
R232  22k  [0402-TIGHT]  50.06,145.35 90 top
R233  33k  [0402-TIGHT]  50.08,143.24 90 top
R234  5.1k  [0402-TIGHT]  44.56,141.65 270 top
R235  5.1k  [0402-TIGHT]  40.38,146.43 270 top
R236  10k  [0402-TIGHT]  40.46,156.54 0 top
R237  100  [0402-TIGHT]  41.9,154.59 0 top
R238  1k  [0402-TIGHT]  39.32,146.43 270 top
R239  10k  [0402-TIGHT]  47.68,157.06 0 top
R240  10k  [0402-TIGHT]  47.68,153.2 180 top
R241  4.7k  [0402-TIGHT]  39.12,164.32 0 top
R242  2.2k  [0402-TIGHT]  34.7,139.34 0 bottom
R243  2.2k  [0402-TIGHT]  34.73,138.25 0 bottom
R244  100  [0402-TIGHT]  35.11,152.43 0 bottom
R245  100k  [0402-TIGHT]  37.83,150.47 270 bottom
R246  100k  [0402-TIGHT]  33.89,145.14 270 bottom
R247  100k  [0402-TIGHT]  50.32,138.94 180 bottom
R248  100  [0402-TIGHT]  52,138.47 270 bottom
R249  1k  [0402-TIGHT]  33.86,147.52 270 bottom
R250  100  [0402-TIGHT]  48.45,137.62 0 bottom
R251  100k  [0402-TIGHT]  65.28,155.55 180 top
R252  4.7k  [0402-TIGHT]  65.02,164.08 180 top
R253  2.0k  [0603]  63.79,157.8 180 top
R254  10k  [0402-TIGHT]  73.42,147.35 270 top
R255  4.7k  [0402-TIGHT]  61.93,166.41 0 top
R256  100k  [0402-TIGHT]  57.05,160.22 180 top
R257  22k  [0402-TIGHT]  73.43,145.35 90 top
R258  33k  [0402-TIGHT]  73.44,143.24 90 top
R259  5.1k  [0402-TIGHT]  67.93,141.65 270 top
R260  5.1k  [0402-TIGHT]  63.75,146.43 270 top
R261  10k  [0402-TIGHT]  63.83,156.54 0 top
R262  100  [0402-TIGHT]  65.27,154.59 0 top
R263  1k  [0402-TIGHT]  62.68,146.43 270 top
R264  10k  [0402-TIGHT]  71.05,157.06 0 top
R265  10k  [0402-TIGHT]  71.04,153.2 180 top
R266  4.7k  [0402-TIGHT]  62.48,164.32 0 top
R267  2.2k  [0402-TIGHT]  58.06,139.34 0 bottom
R268  2.2k  [0402-TIGHT]  58.09,138.25 0 bottom
R269  100  [0402-TIGHT]  58.48,152.43 0 bottom
R270  100k  [0402-TIGHT]  61.2,150.47 270 bottom
R271  100k  [0402-TIGHT]  57.26,145.14 270 bottom
R272  100k  [0402-TIGHT]  73.69,138.94 180 bottom
R273  100  [0402-TIGHT]  75.37,138.47 270 bottom
R274  1k  [0402-TIGHT]  57.23,147.52 270 bottom
R275  100  [0402-TIGHT]  71.82,137.62 0 bottom
R276  100k  [0402-TIGHT]  88.65,155.55 180 top
R277  4.7k  [0402-TIGHT]  88.39,164.08 180 top
R278  2.0k  [0603]  87.16,157.8 180 top
R279  10k  [0402-TIGHT]  96.79,147.35 270 top
R280  4.7k  [0402-TIGHT]  85.3,166.41 0 top
R281  100k  [0402-TIGHT]  80.42,160.22 180 top